# Altium PCB Control_Board_Model_C_Rigid_Flex_Flipped.PcbDoc (part 1 of 8)
Units mil, origin at the board's own origin, x right, y up, seen from the top; angles counter-clockwise.
Board outline 3417.32 x 2110.24 mil, 6 copper layers (1-Sig/GND, 2-Sig, 3-GND, 4-Sig/Pwr, 5-Sig, 6-Sig/GND), stack 39.291 mil thick; 418 components, 342 nets, 1601 pads, 44 vias.
Unrouted connection lines stored in the file: 13.
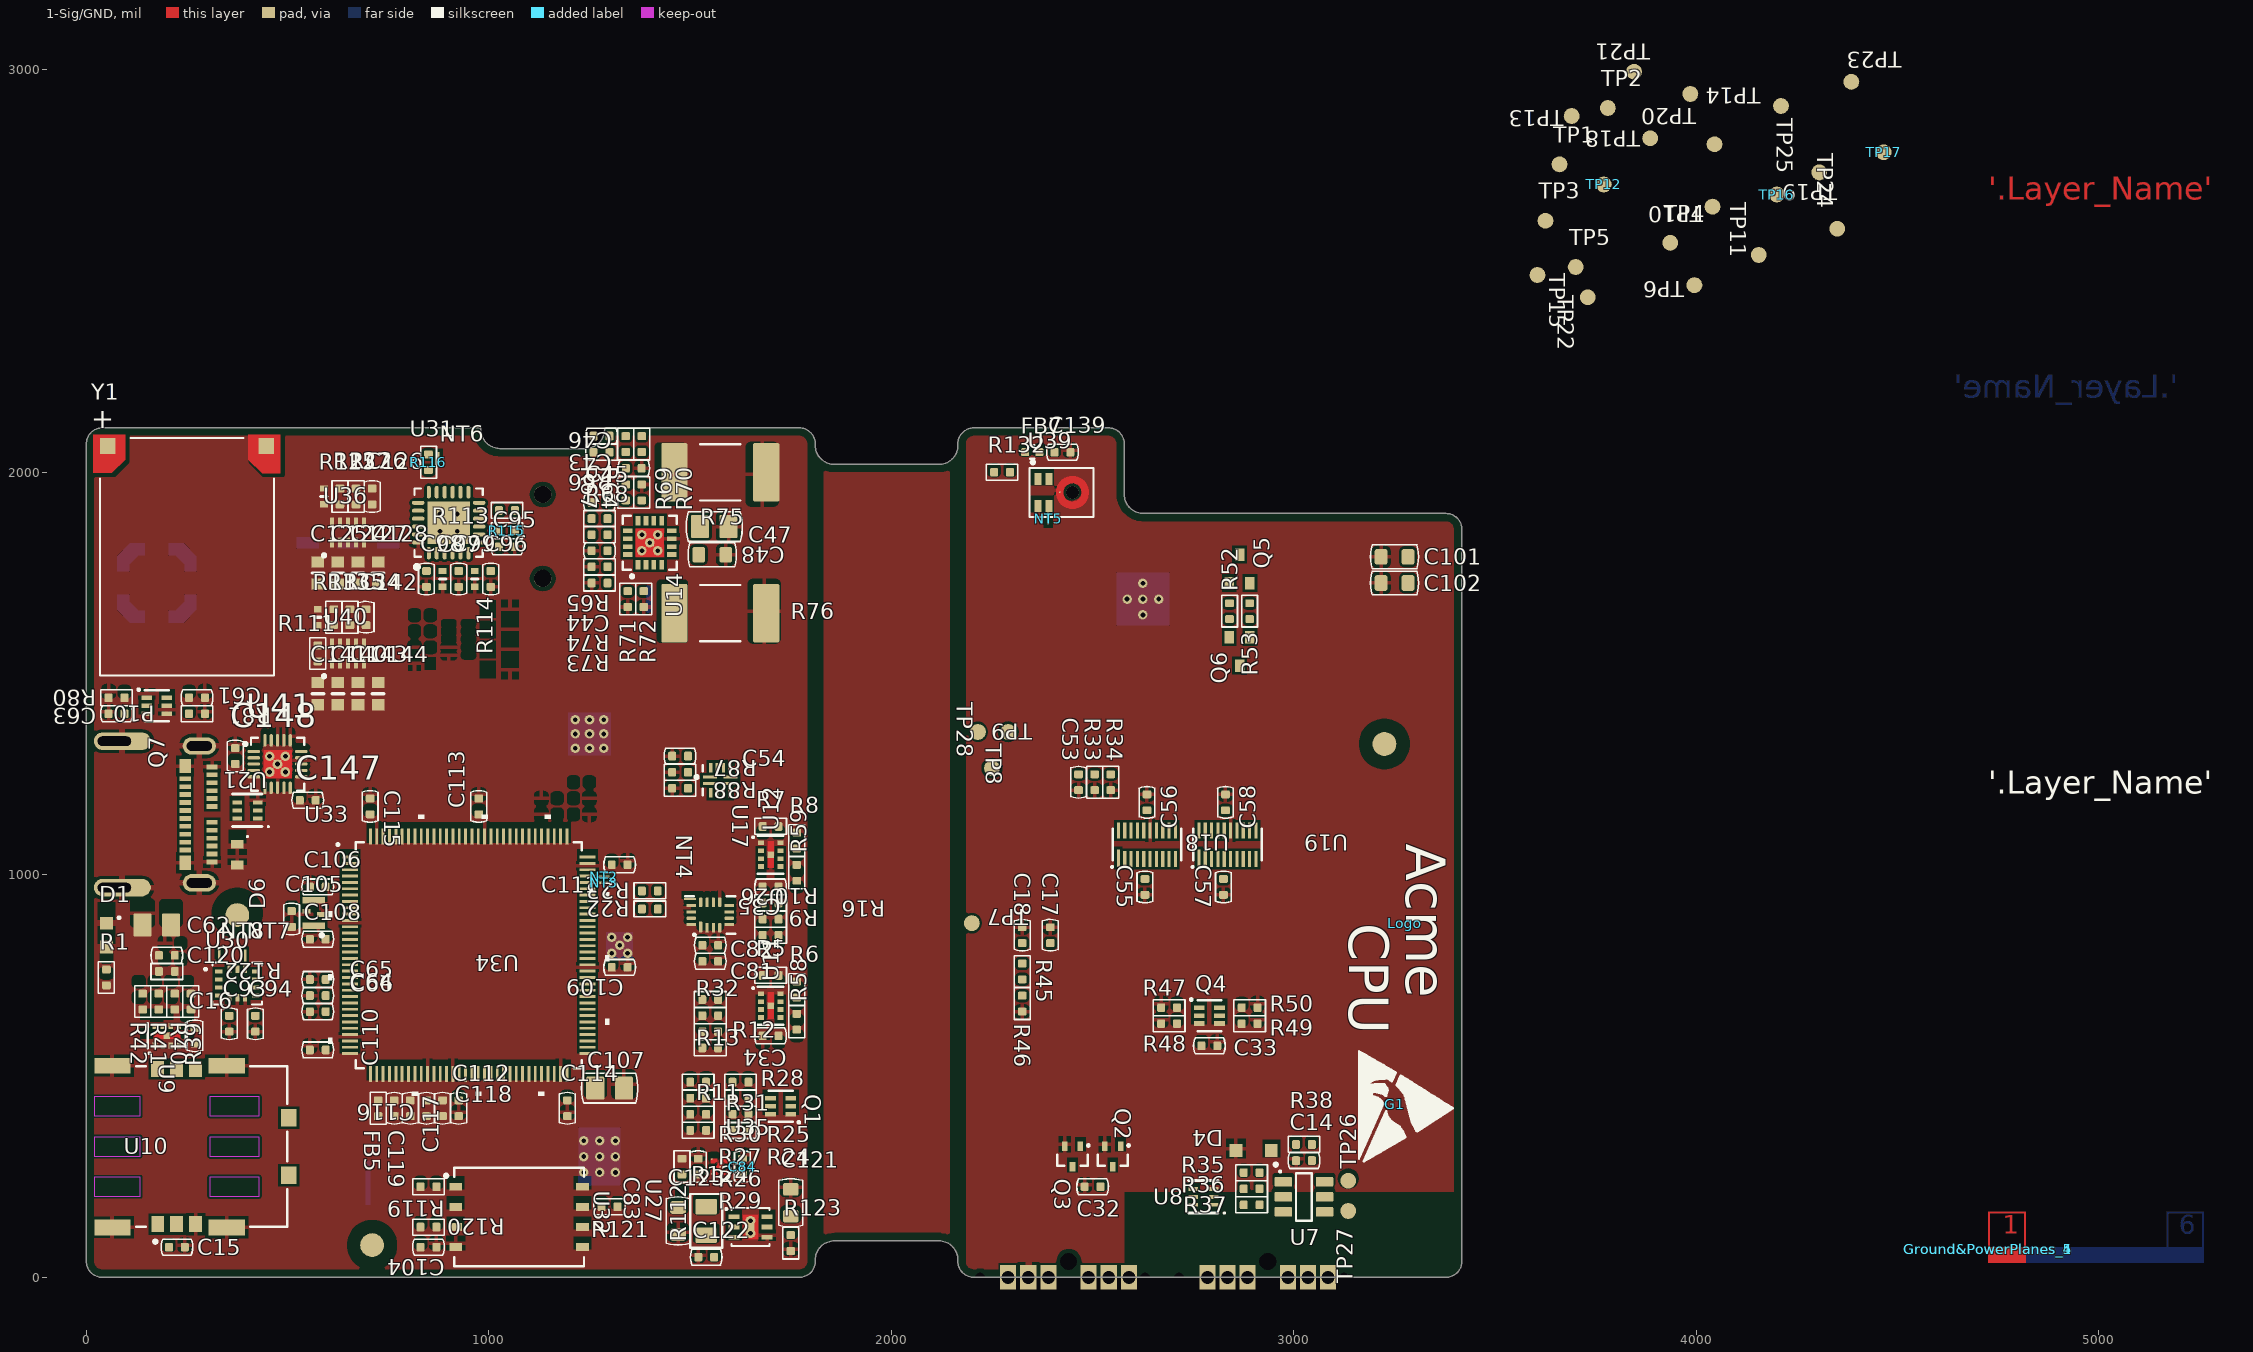
[diagram p0: 1-Sig/GND view]
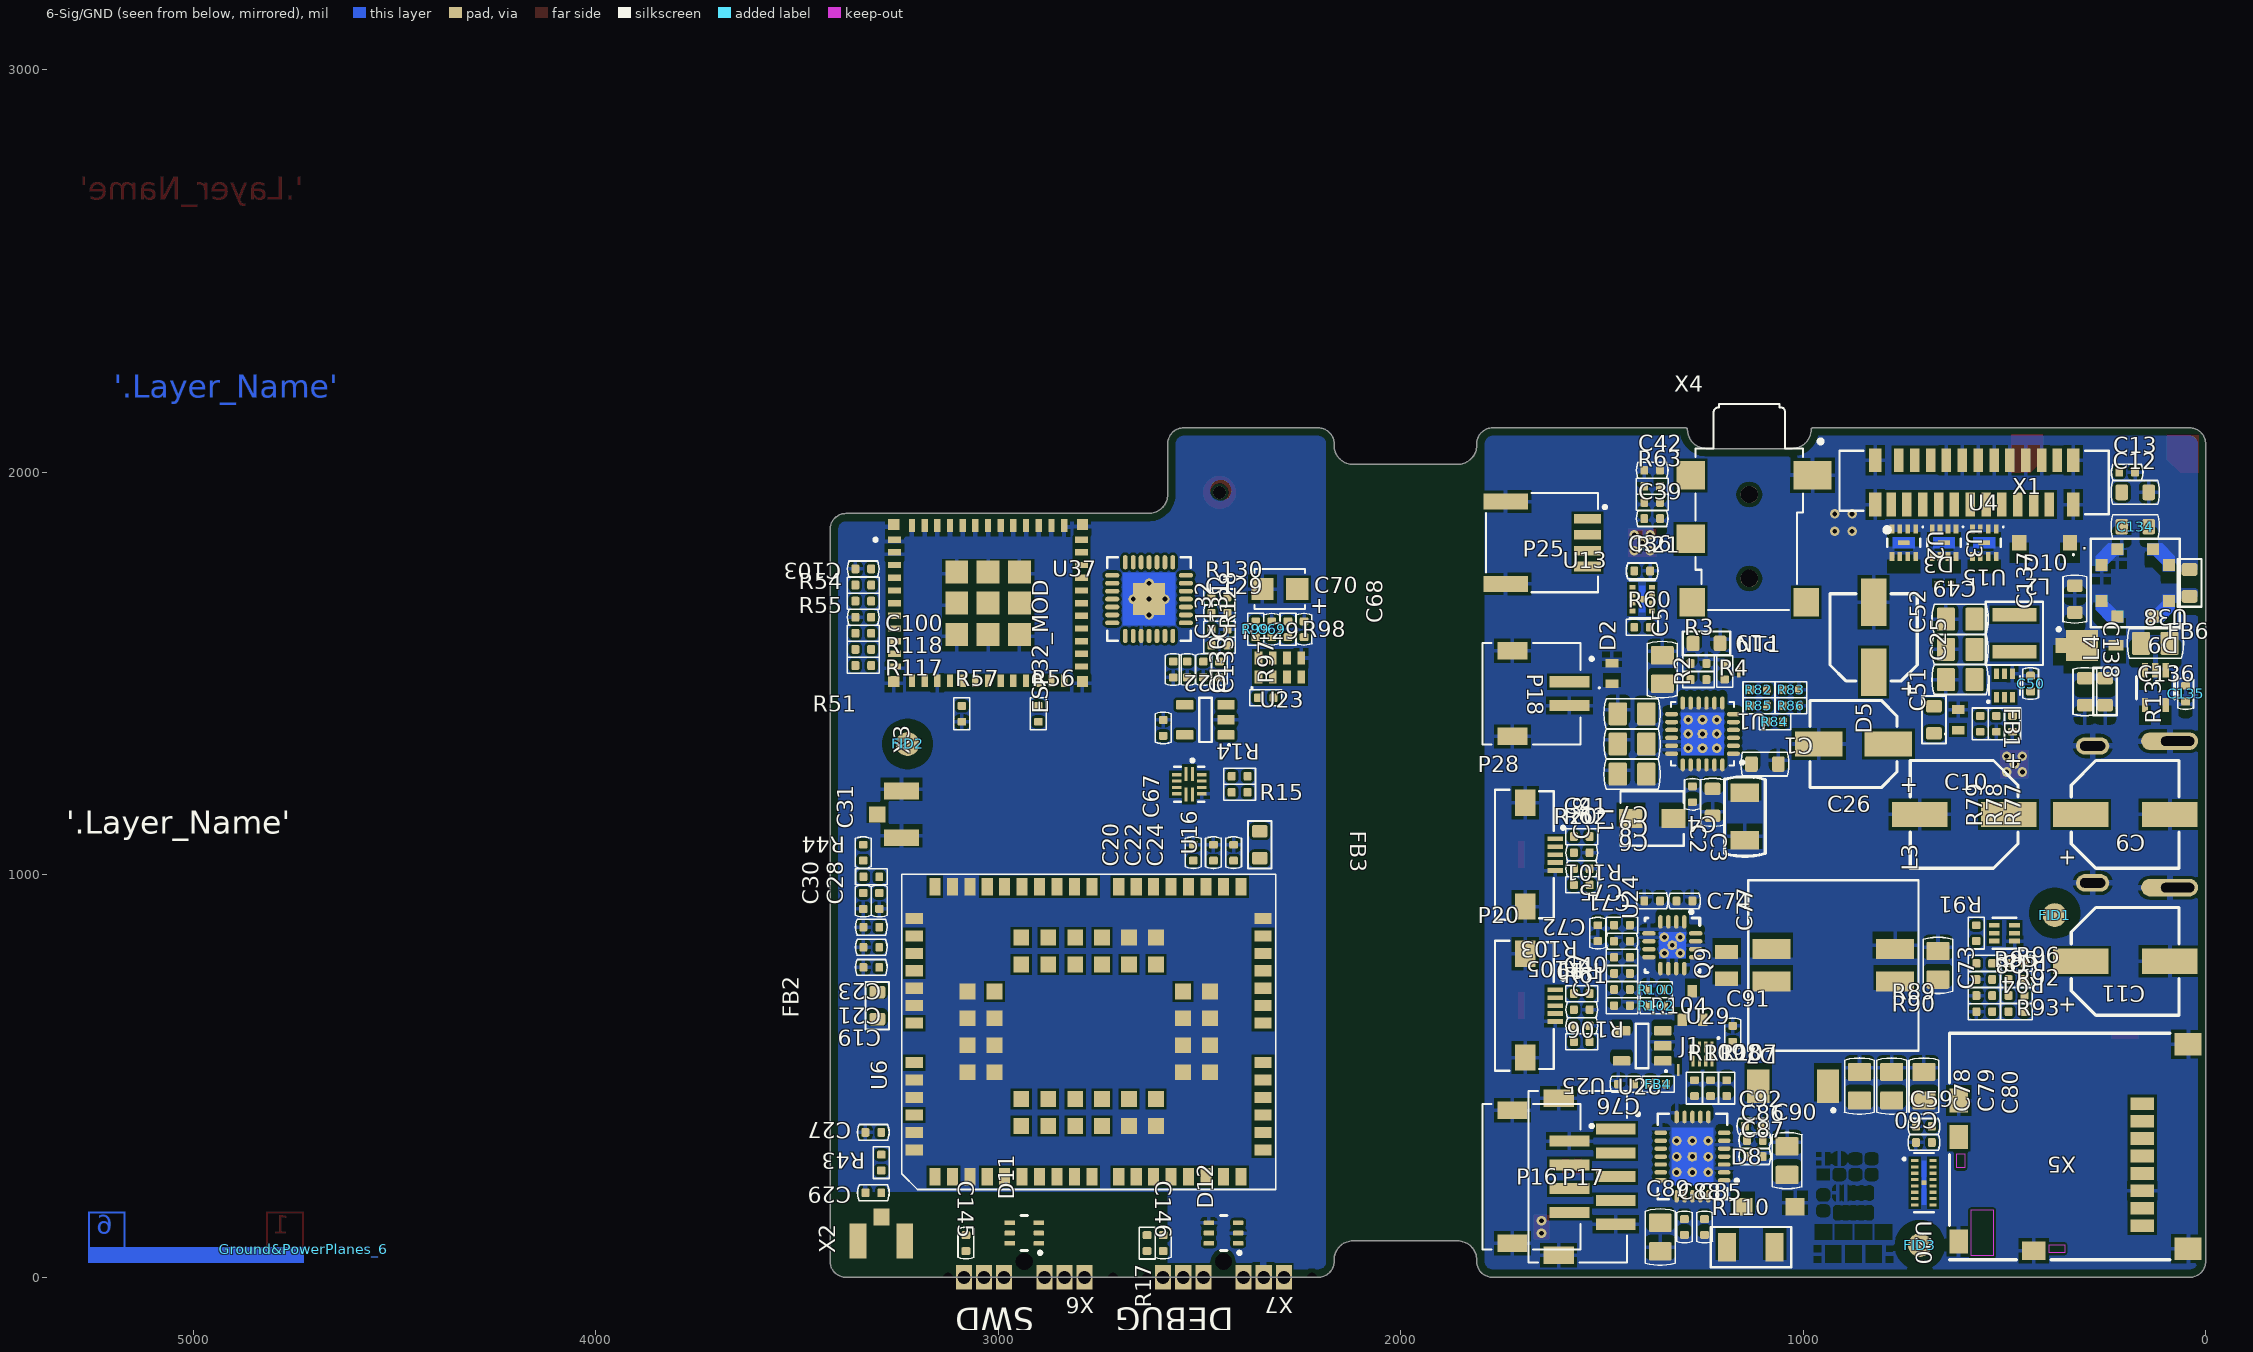
[diagram p1: 6-Sig/GND view, seen from below]
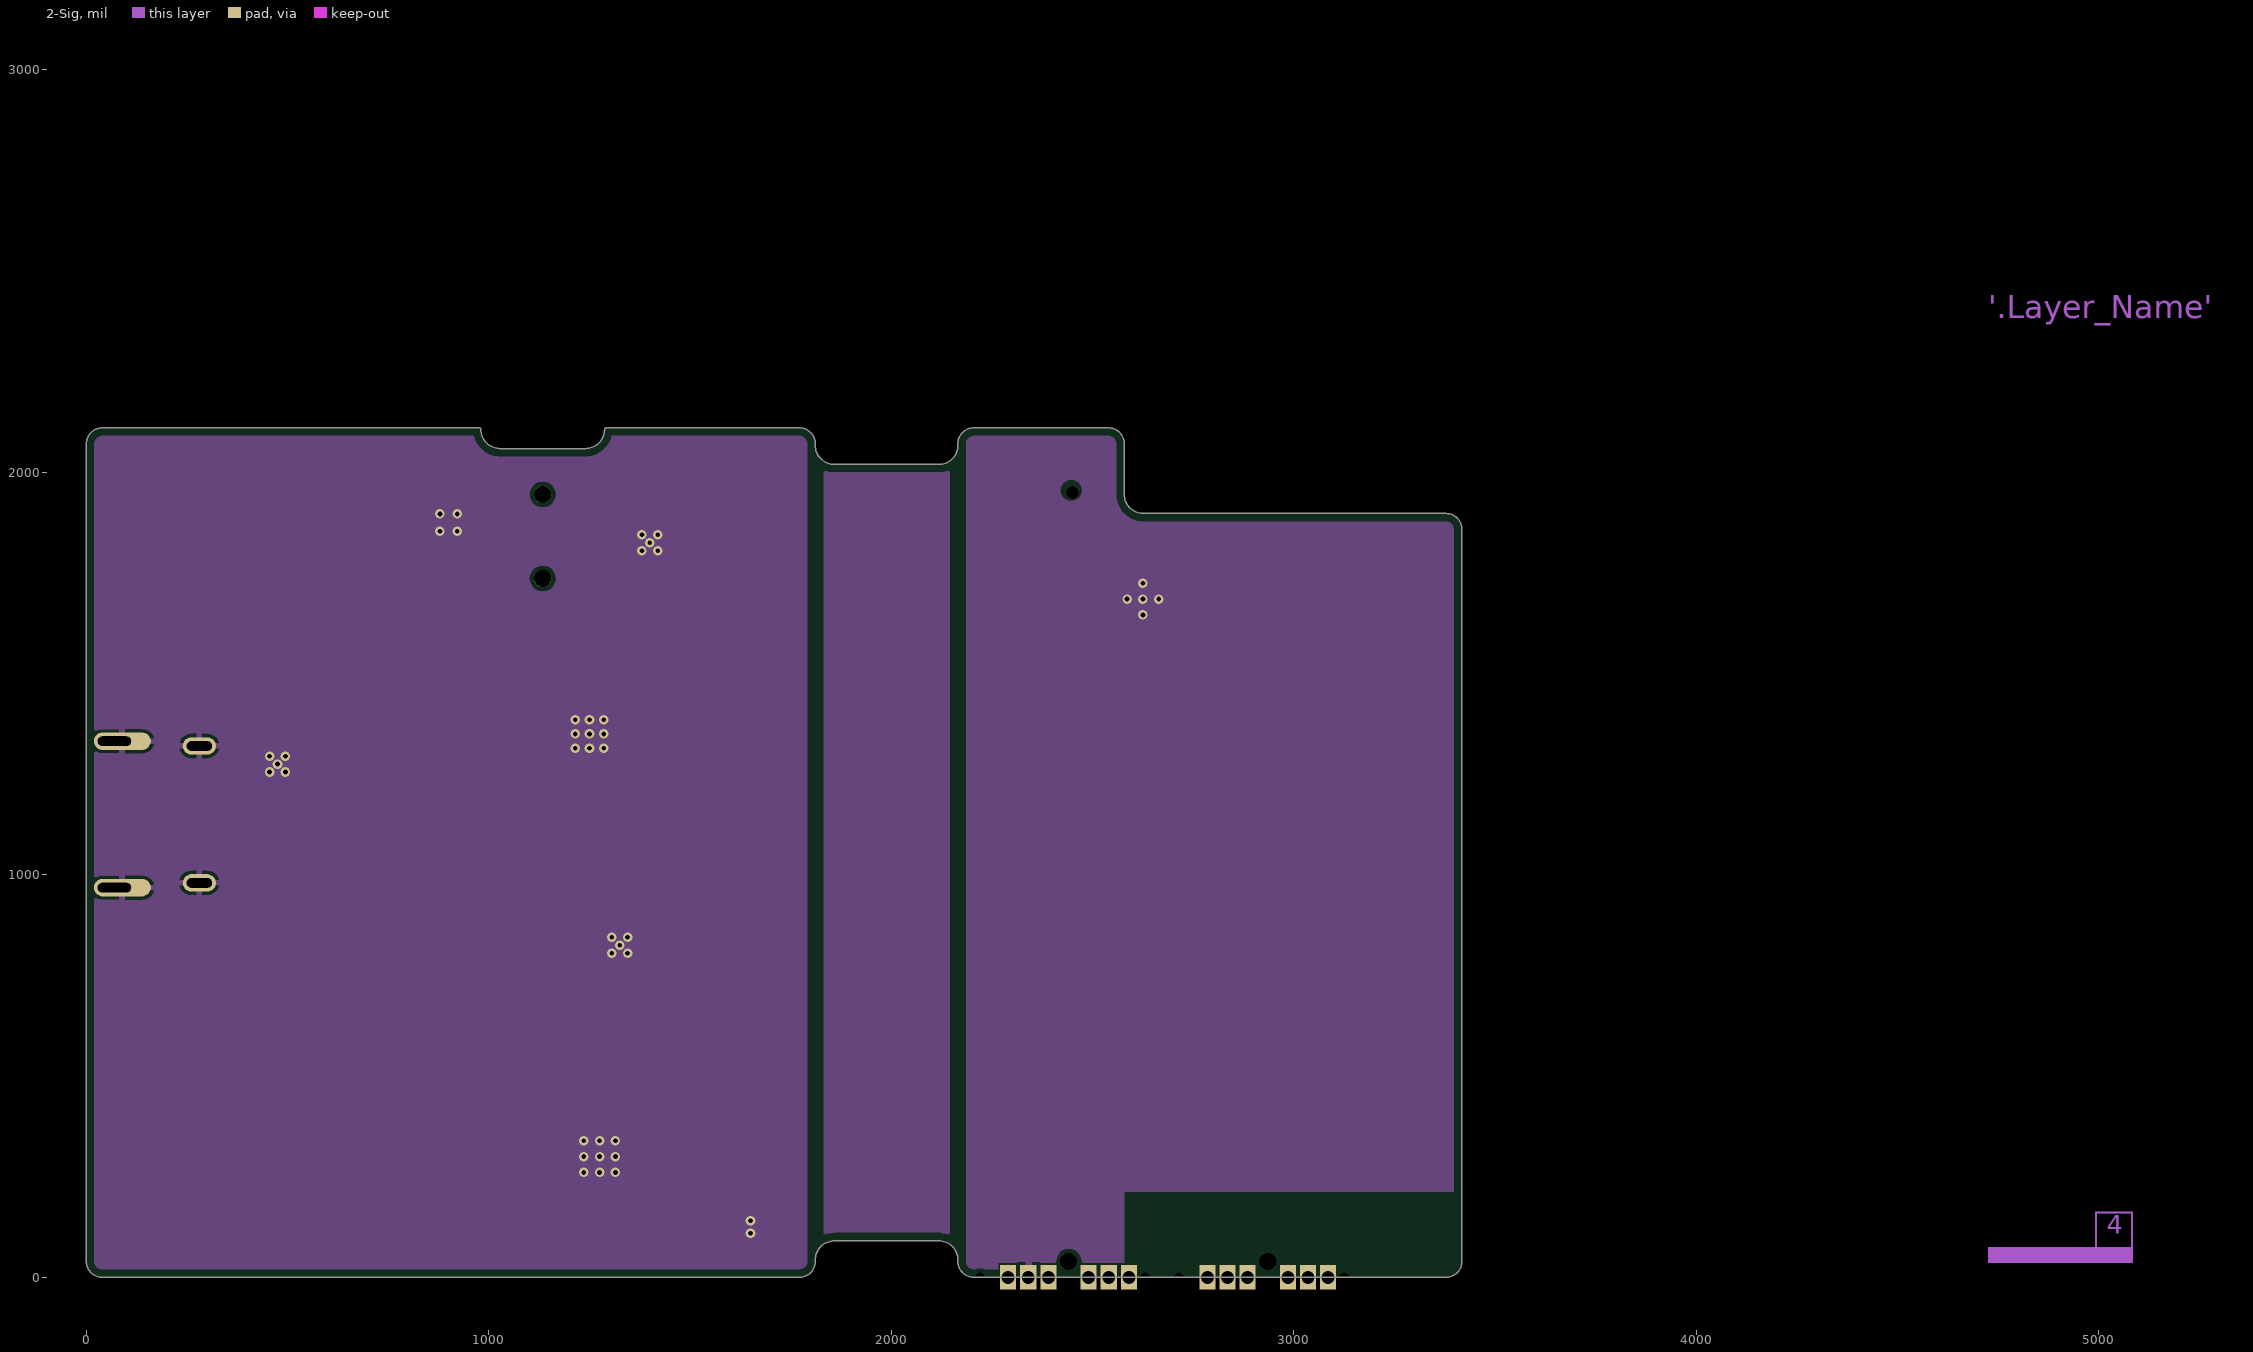
[diagram p2: 2-Sig]
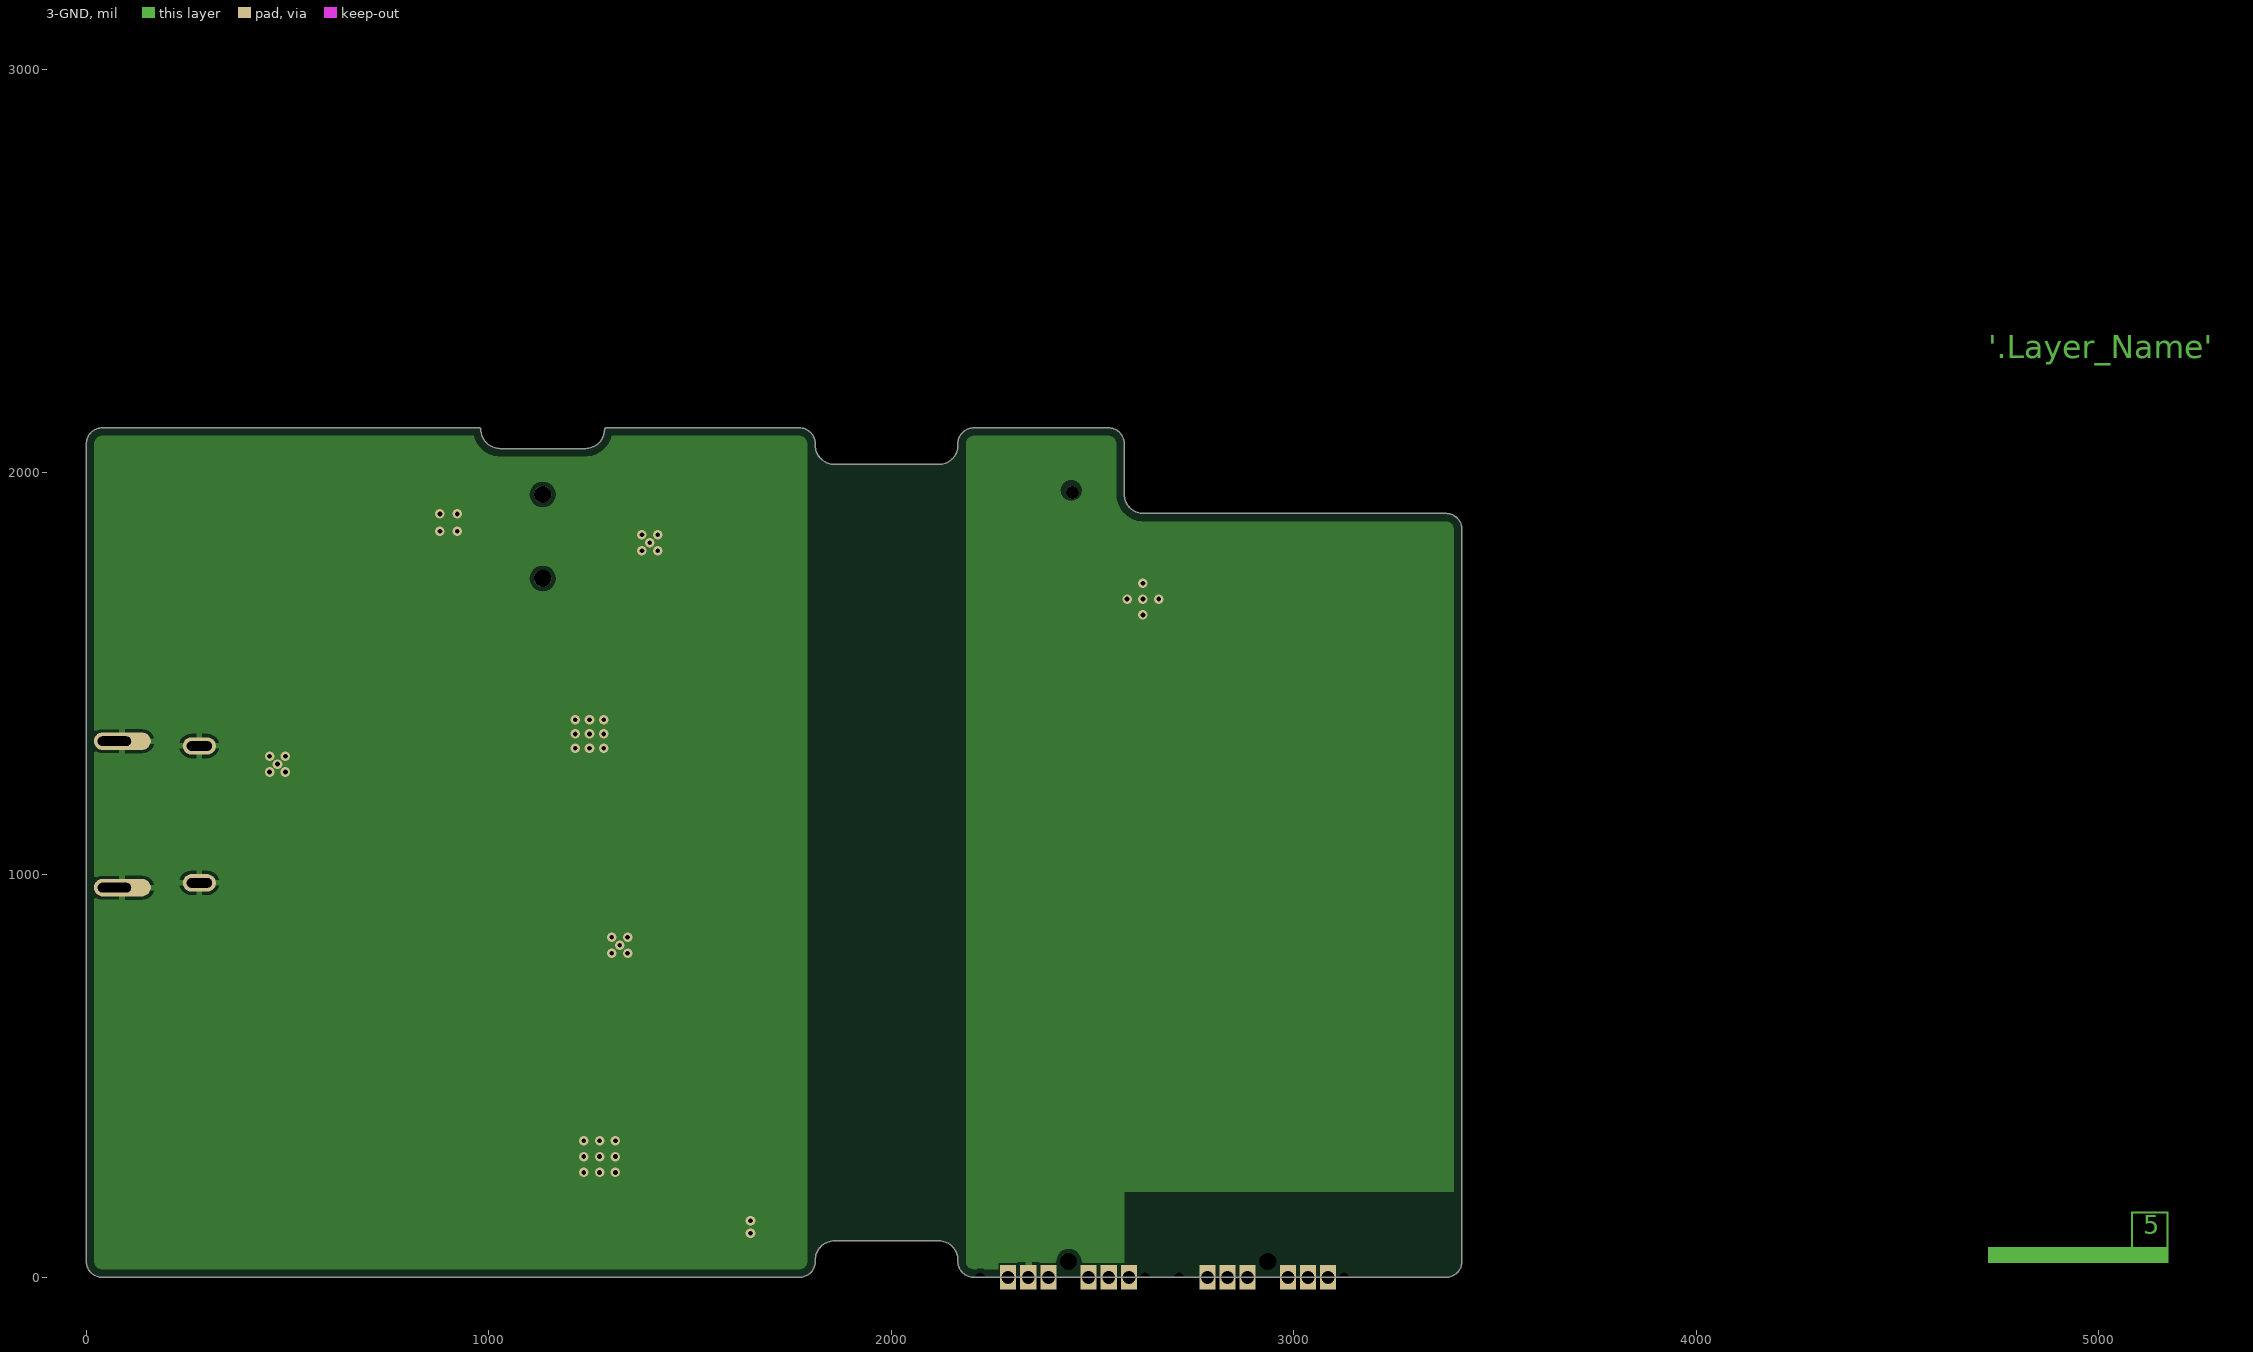
[diagram p3: 3-GND]
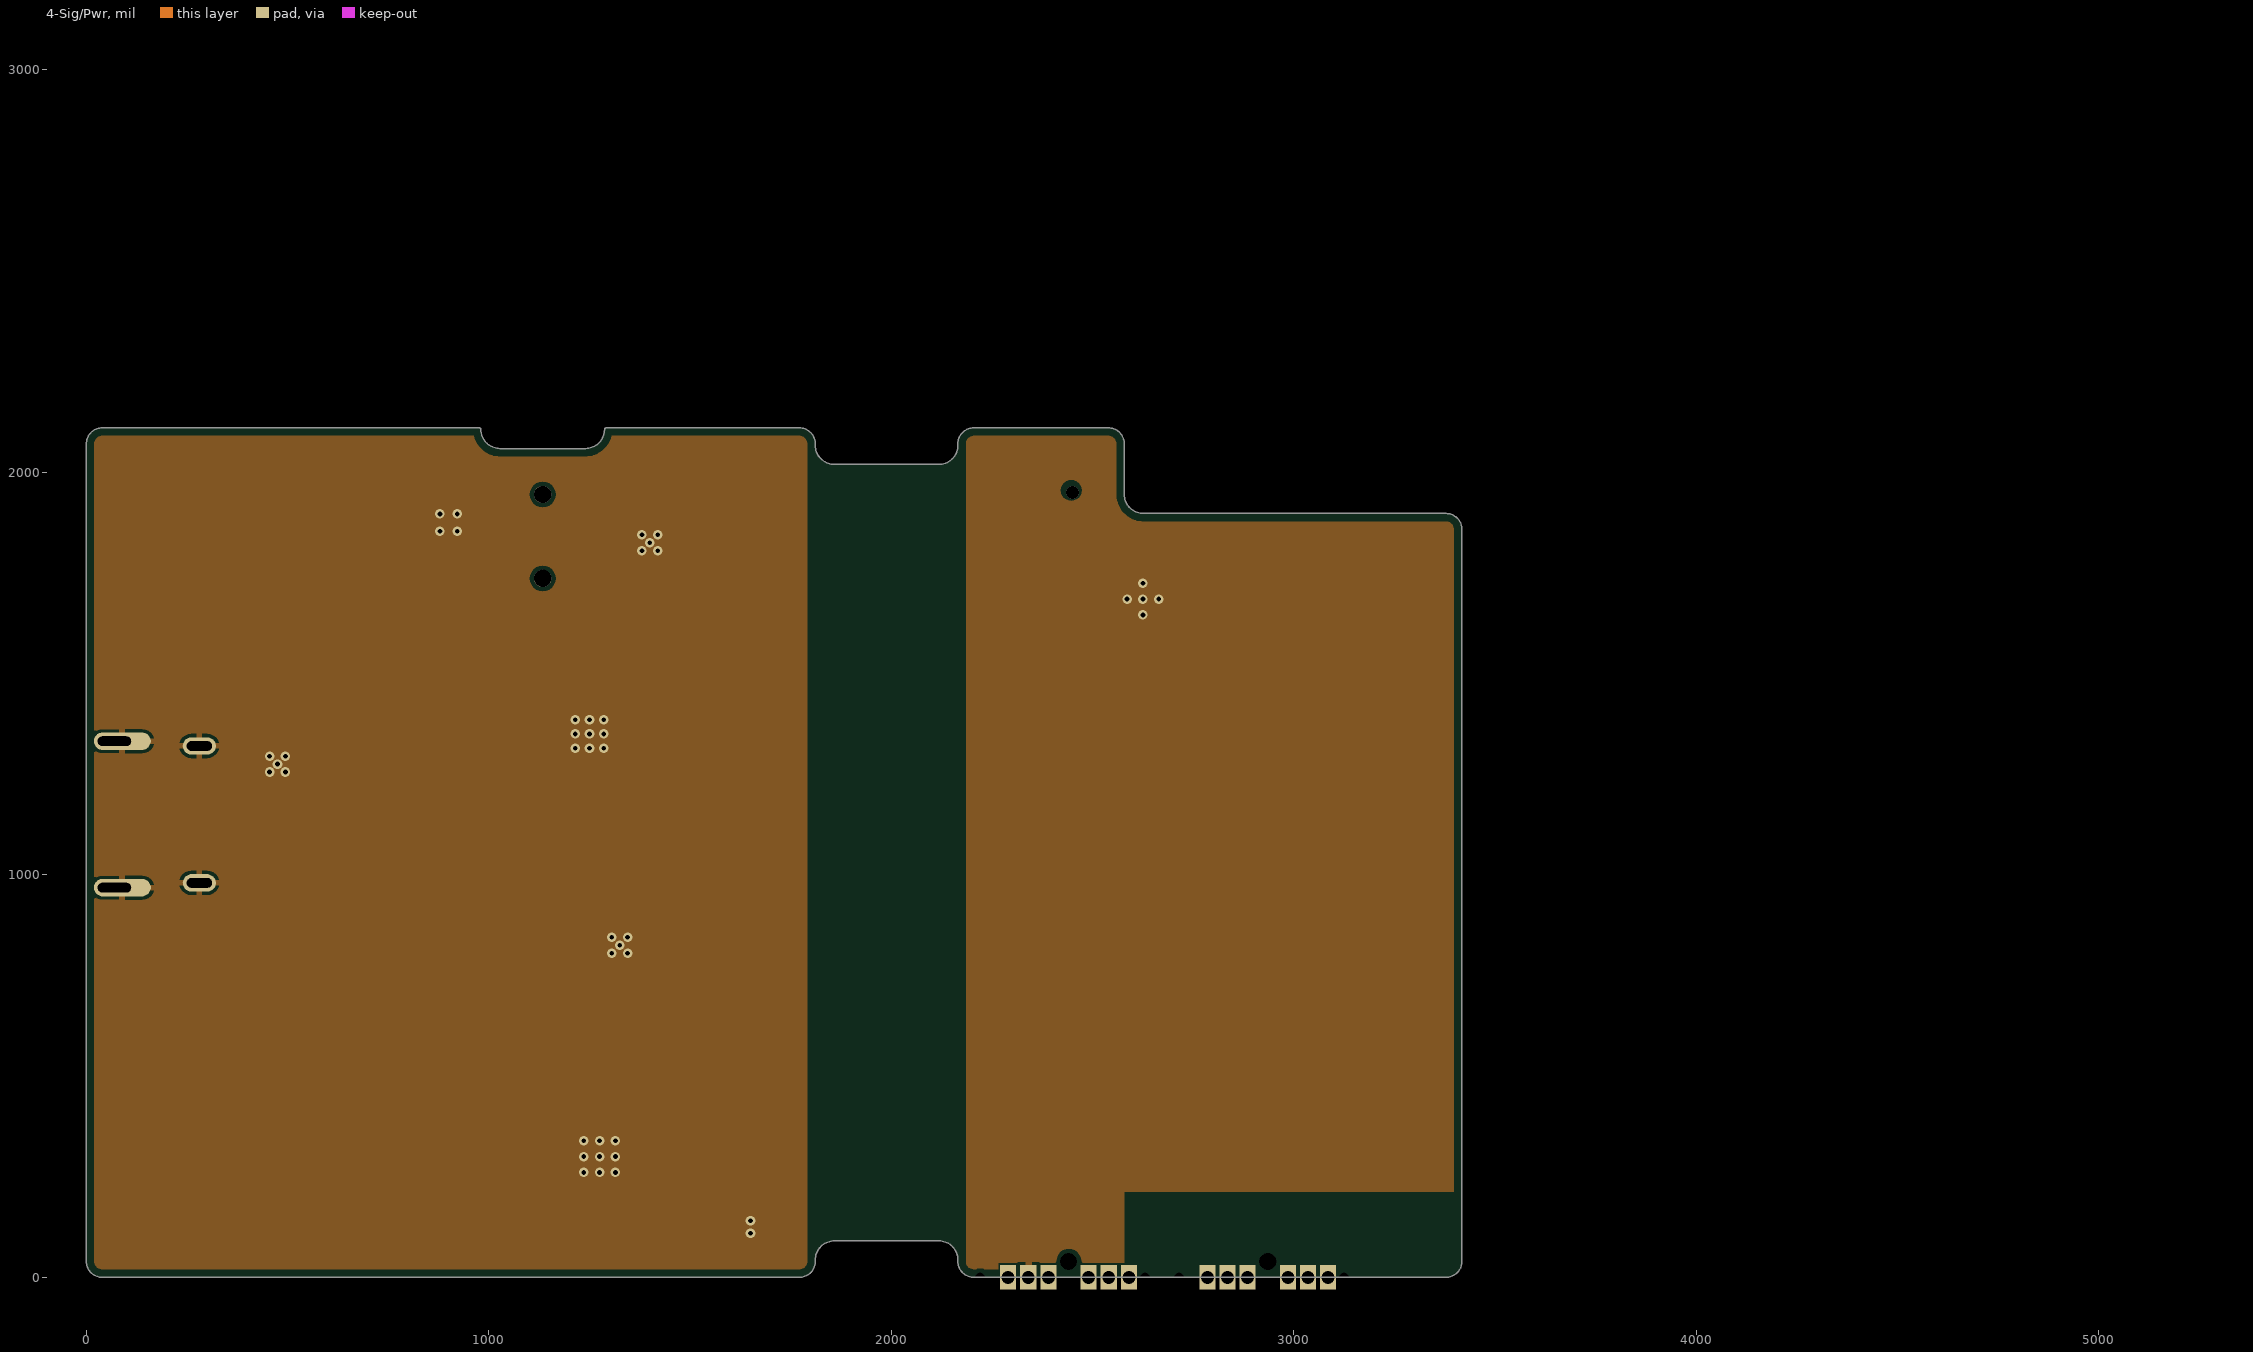
[diagram p4: 4-Sig/Pwr]
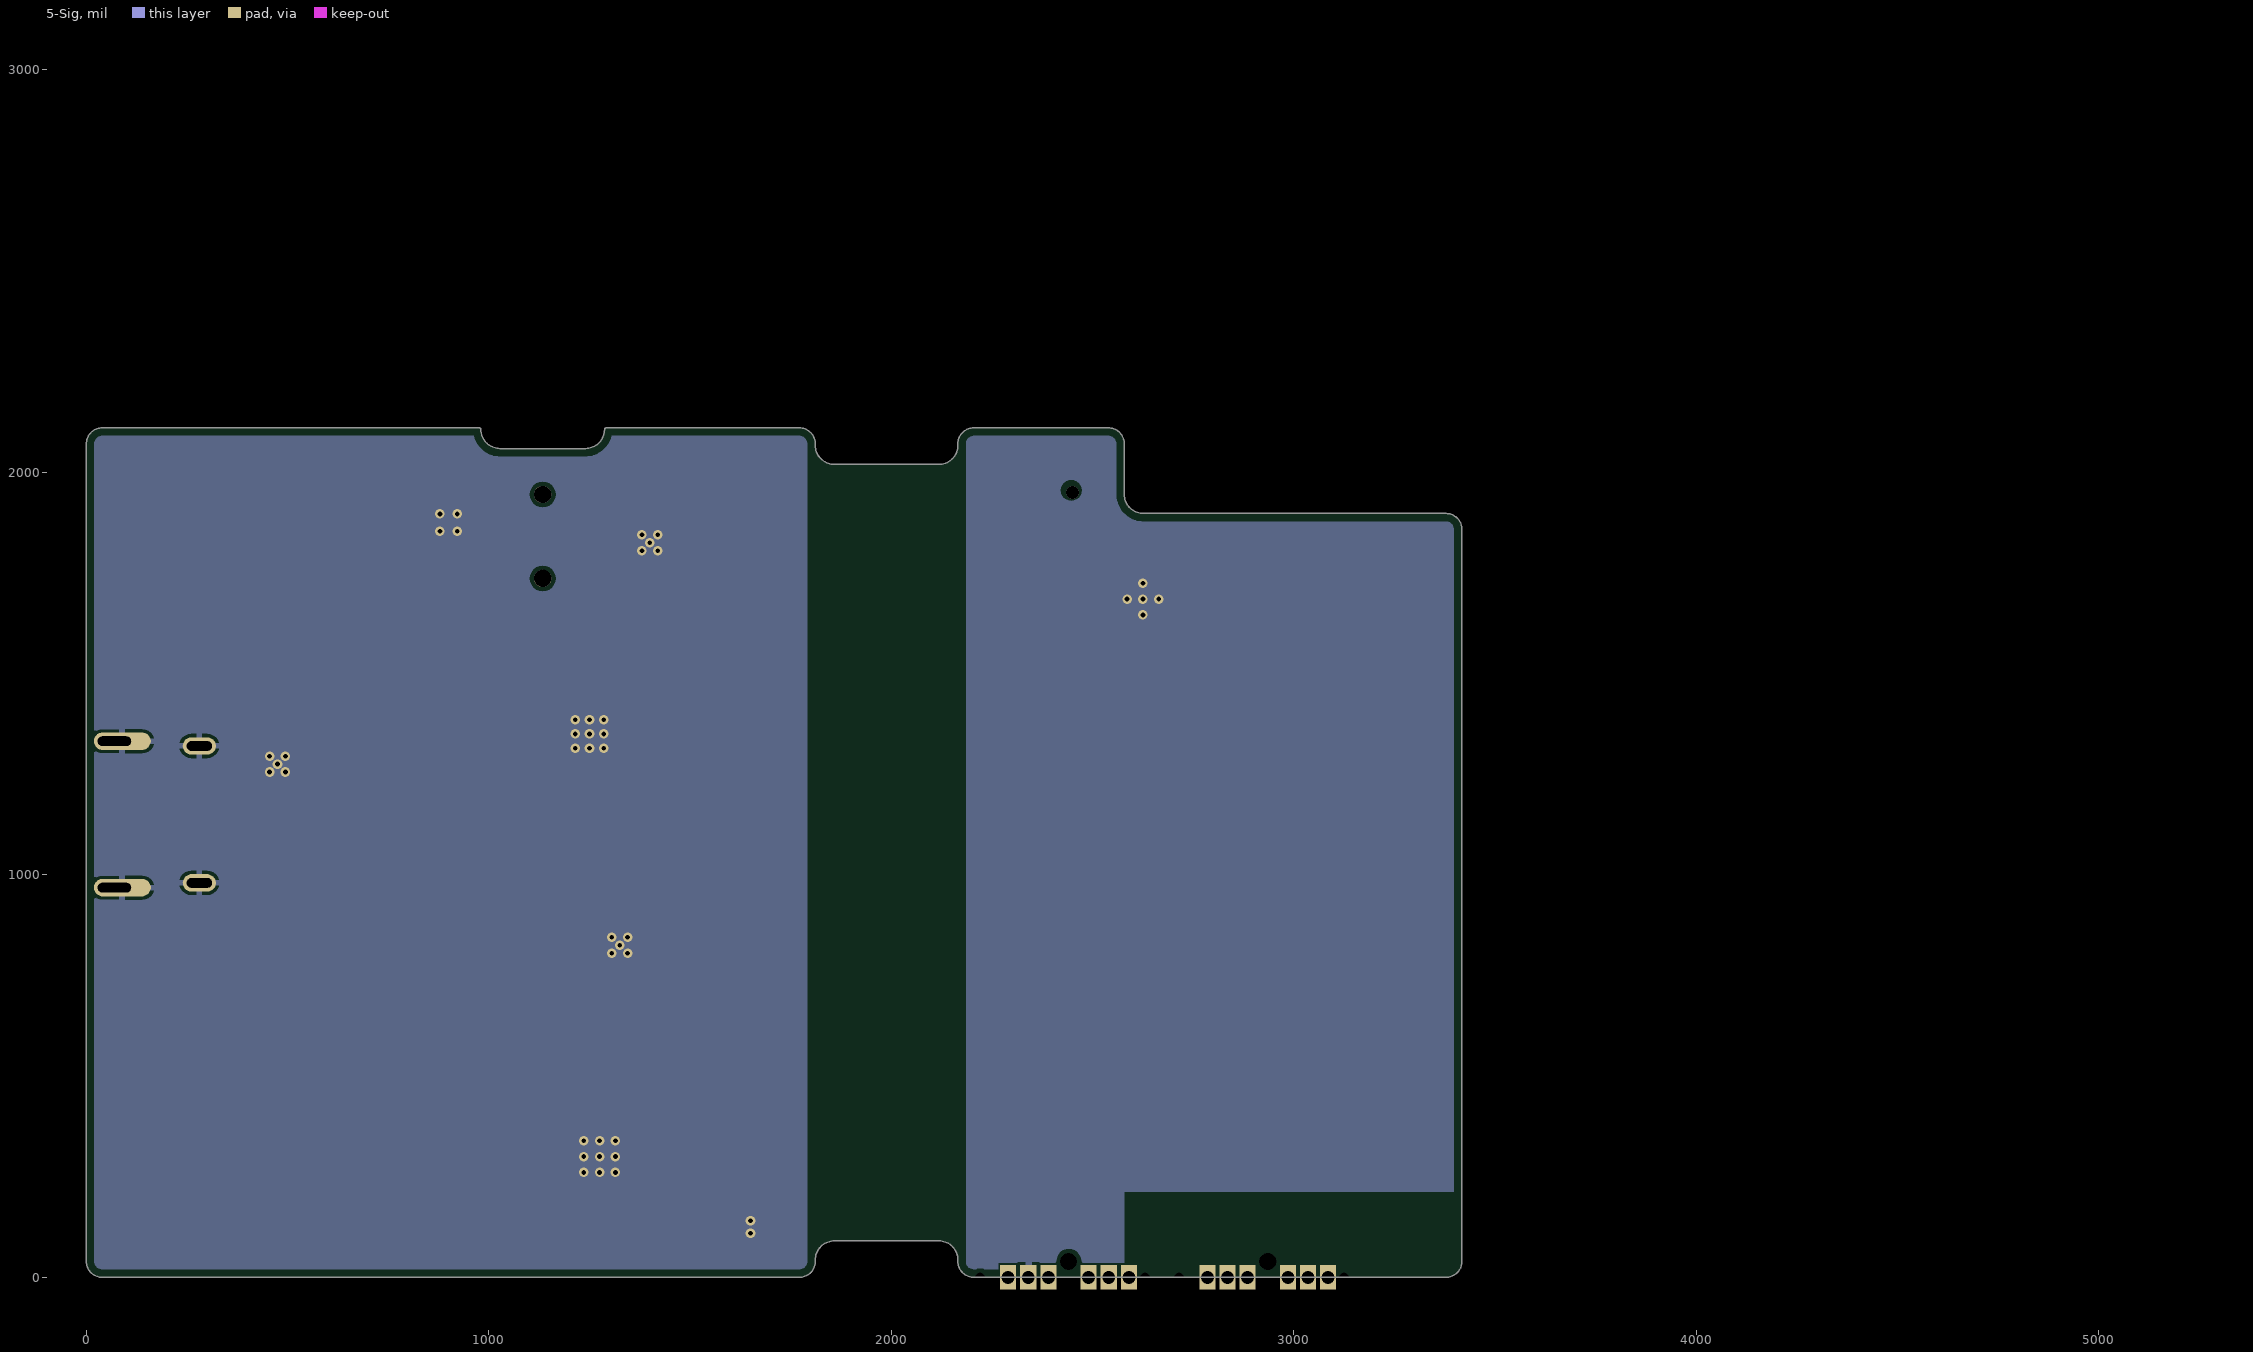
[diagram p5: 5-Sig]

## Layer stack, top to bottom
Top Solder: solder mask 1.5748, WE-SMFlex-0002, Dk 4.3
Top Solder: solder mask 0.5906, WE-SM-0001, Dk 3.5
1-Sig/GND: signal copper 1.7717
Polyimide: core 1.9685, WE-PI-0103, Dk 3.4
2-Sig: signal copper 0.6693
Dielectric 1: prepreg 3.937, WE-PP-0033, Dk 4.4
Core 1: core 9.8425, WE-CO-0045, Dk 4.3
3-GND: signal copper 0.6693
Dielectric 2: prepreg 4.9213, WE-PP-0035, Dk 3.7
4-Sig/Pwr: signal copper 0.6693
Core 2: core 9.8425, WE-CO-0045, Dk 4.3
5-Sig: signal copper 0.6693
Dielectric 3: prepreg 2.5591, WE-PP-0034, Dk 3.5
6-Sig/GND: signal copper 1.7717
Bottom Solder: solder mask 1.5748, WE-CL-0007, Dk 3.6
Bottom Solder: solder mask 0.5906, WE-SM-0001, Dk 3.5

## Board outline
39.37,0 cw(c39.37,39.37) 0,39.37 0,2070.87 cw(c39.37,2070.87) 39.37,2110.24 976.38,2110.24 cw(c976.38,2106.31) 980.31,2106.3 ccw(c1027.55,2106.29) 1027.56,2059.06 1240.16,2059.06 ccw(c1240.16,2106.3) 1287.4,2106.3 cw(c1291.34,2106.3) 1291.34,2110.24 1771.65,2110.24 cw(c1771.64,2070.87) 1811.01,2070.86 1811.02,2070.86 1811.02,2066.93 ccw(c1858.27,2066.93) 1858.27,2019.69 2118.11,2019.69 ccw(c2118.11,2066.93) 2165.35,2066.93 2165.35,2070.87 cw(c2204.72,2070.87) 2204.72,2110.23 2204.72,2110.24 2539.37,2110.24 cw(c2539.37,2070.87) 2578.74,2070.87 2578.74,1944.88 ccw(c2625.98,1944.88) 2625.98,1897.64 3377.95,1897.64 cw(c3377.95,1858.27) 3417.32,1858.27 3417.32,39.37 cw(c3377.95,39.37) 3377.95,0 2204.72,0 cw(c2204.72,39.36) 2165.35,39.37 2165.35,43.31 ccw(c2118.12,43.31) 2118.12,90.54 1858.27,90.55 ccw(c1858.27,43.31) 1811.02,43.31 1811.02,39.37 cw(c1771.67,39.35) 1771.65,0
board region "Layer Stack Region 2": 2165.37,35.4 2165.35,35.49 2165.35,39.37 2165.35,43.31 2165.13,47.94 2163.32,57.02 2159.78,65.57 2154.63,73.27 2148.09,79.82 2140.39,84.96 2131.83,88.51 2122.75,90.31 2118.12,90.54 1858.27,90.55 1853.64,90.32 1844.56,88.52 1836,84.97 1828.3,79.83 1821.75,73.28 1816.6,65.58 1813.06,57.02 1811.25,47.94 1811.02,43.29 1811.02,2066.94 1811.25,2062.3 1813.06,2053.21 1816.6,2044.66 1821.75,2036.96 1828.3,2030.41 1836,2025.26 1844.56,2021.72 1853.64,2019.91 1858.27,2019.69 2118.11,2019.69 2122.74,2019.91 2131.82,2021.72 2140.38,2025.26 2148.08,2030.41 2154.63,2036.96 2159.77,2044.66 2163.32,2053.21 2165.12,2062.3 2165.35,2066.95
board region "Layer Stack Region 1": 1811.02,42.33 1811.02,39.37 1811.03,35.49 1809.51,27.88 1806.55,20.72 1802.24,14.27 1796.75,8.78 1790.31,4.47 1783.14,1.51 1775.53,0 1771.65,0 39.37,0 35.49,0 27.89,1.51 20.72,4.48 14.27,8.79 8.79,14.27 4.48,20.72 1.51,27.89 0,35.49 0,39.37 0,2070.87 0,2074.74 1.51,2082.35 4.48,2089.52 8.79,2095.96 14.27,2101.45 20.72,2105.76 27.89,2108.72 35.49,2110.24 39.37,2110.24 976.38,2110.24 977.16,2110.24 978.61,2109.64 979.72,2108.53 980.32,2107.08 980.32,2106.3 980.54,2101.67 982.35,2092.58 985.89,2084.03 991.04,2076.33 997.59,2069.78 1005.29,2064.63 1013.84,2061.09 1022.93,2059.28 1027.56,2059.06 1240.16,2059.06 1244.79,2059.28 1253.87,2061.09 1262.43,2064.63 1270.13,2069.78 1276.68,2076.33 1281.82,2084.03 1285.37,2092.59 1287.17,2101.67 1287.4,2106.3 1287.4,2107.08 1288,2108.53 1289.11,2109.64 1290.56,2110.24 1291.34,2110.24 1771.65,2110.24 1775.53,2110.24 1783.14,2108.72 1790.3,2105.75 1796.75,2101.44 1802.23,2095.95 1806.53,2089.5 1809.5,2082.34 1811.01,2074.73 1811.02,2070.86 1811.02,2067.59
board region "Layer Stack Region 3": 2165.35,2067.84 2165.35,2070.87 2165.35,2074.74 2166.87,2082.35 2169.83,2089.51 2174.14,2095.96 2179.63,2101.45 2186.07,2105.75 2193.24,2108.72 2200.84,2110.23 2204.72,2110.24 2539.37,2110.24 2543.25,2110.24 2550.85,2108.72 2558.02,2105.76 2564.47,2101.45 2569.95,2095.96 2574.26,2089.52 2577.23,2082.35 2578.74,2074.74 2578.74,2070.87 2578.74,1944.88 2578.97,1940.25 2580.77,1931.17 2584.32,1922.61 2589.46,1914.91 2596.01,1908.36 2603.71,1903.22 2612.27,1899.67 2621.35,1897.87 2625.98,1897.64 3377.95,1897.64 3381.83,1897.64 3389.44,1896.13 3396.6,1893.16 3403.05,1888.85 3408.53,1883.37 3412.84,1876.92 3415.81,1869.75 3417.32,1862.15 3417.32,1858.27 3417.32,39.37 3417.32,35.49 3415.81,27.89 3412.84,20.72 3408.53,14.27 3403.05,8.79 3396.6,4.48 3389.44,1.51 3381.83,0 3377.95,0 2204.72,0 2200.85,0 2193.24,1.51 2186.07,4.48 2179.62,8.79 2174.14,14.27 2169.83,20.72 2166.86,27.88 2165.37,35.41

## Design rules (kind name [scope] priority, off if disabled: settings)
BoardOutlineClearance BoardOutlineClearance_LayerStack [WithinRoom('PCB_Stackup')] p1: gap=0 ignorepadtopadclearanceinfootprint=FALSE
BoardOutlineClearance BoardOutlineClearance_LayerNames [WithinRoom('Layer_Names')] p2: gap=0 ignorepadtopadclearanceinfootprint=FALSE
BoardOutlineClearance BoardOutlineClearance_uSD_Slot [HasFootprintPad('5025700893','0')] p3: gap=0 ignorepadtopadclearanceinfootprint=FALSE
BoardOutlineClearance BoardOutlineClearance_USB-C_Conn [HasFootprintPad('MOLEX_2012670005','S3') or HasFootprintPad('MOLEX_2012670005','S4')] p4: gap=0 ignorepadtopadclearanceinfootprint=FALSE
BoardOutlineClearance BoardOutlineClearance_nanoSIM_Slot [HasFootprintPad('1042240820_MOL','G4') or HasFootprintPad('1042240820_MOL','G1') or ((ObjectKind = 'Fill') and HasFootprint('1042240820_MOL'))] p5: gap=0 ignorepadtopadclearanceinfootprint=FALSE
BoardOutlineClearance BoardOutlineClearance_Overlays [OnBottomSilkscreen or OnTopSilkscreen] p6: gap=0 ignorepadtopadclearanceinfootprint=FALSE
BoardOutlineClearance BoardFlexRigid [OnLayer('Top Side')] p7: gap=19.68 ignorepadtopadclearanceinfootprint=FALSE except(0: Arc-SplitContinuation Track-SplitContinuation Fill-SplitContinuation Poly-SplitContinuation Region-SplitContinuation; 59.06: SMDPad-SplitBarrior SMDPad-SplitContinuation THPad-SplitBarrior THPad-SplitContinuation Via-SplitBarrior Via-SplitContinuation Text-SplitContinuation)
BoardOutlineClearance [All] p8: gap=19.68 ignorepadtopadclearanceinfootprint=FALSE
Clearance Clearance_InnerLayers [not OnTopLayer and not OnBottomLayer] p1: gap=6 ignorepadtopadclearanceinfootprint=TRUE except(5.98: Arc-SMDPad Arc-THPad Arc-Via Track-SMDPad Track-THPad Track-Via THPad-THPad THPad-Via THPad-Fill THPad-Poly THPad-Region Via-Via Via-Fill Via-Poly Via-Region; 9.84: Arc-Hole Track-Hole SMDPad-Hole THPad-Hole Via-Hole Fill-Hole Poly-Hole Region-Hole Text-Hole)
Clearance [All] p2: gap=6 ignorepadtopadclearanceinfootprint=FALSE
ComponentClearance ComponentClearance_NetTie [HasFootprint('Net Tie 6x30mil')] p1: gap=0 collisioncheckmode=3 verticalgap=0 showdistances=FALSE
ComponentClearance ComponentClearance_PCB_Stackup [WithinRoom('PCB_Stackup')] p2: gap=0 collisioncheckmode=3 verticalgap=0 showdistances=FALSE
ComponentClearance ComponentClearance_Motor_Connectors [HasFootprint('CONN_JST_S5B-ZR-SM4A-TF(LF)(SN)') vs HasFootprint('CONN_JST_S4B-ZR-SM4A-TF(LF)(SN)')] p3: gap=0 collisioncheckmode=3 verticalgap=0 showdistances=FALSE
ComponentClearance [All] p4: gap=12 collisioncheckmode=3 verticalgap=40 showdistances=FALSE
DiffPairsRouting [All] p1: maxlimit=6 minlimit=6 mostfreqgap=6 toplayer_minwidth=6 toplayer_maxwidth=6 toplayer_prefwidth=6 midlayer1_minwidth=6 midlayer1_maxwidth=6 midlayer1_prefwidth=6 midlayer2_minwidth=6 midlayer2_maxwidth=6 midlayer2_prefwidth=6 midlayer3_minwidth=6 midlayer3_maxwidth=6 midlayer3_prefwidth=6 midlayer4_minwidth=6 midlayer4_maxwidth=6 midlayer4_prefwidth=6 bottomlayer_minwidth=6 bottomlayer_maxwidth=6 bottomlayer_prefwidth=6 maxuncoupledlength=500
HoleSize [All] p1: absolutevalues=TRUE maxlimit=248.03 minlimit=5.91 maxpercent=80.000 minpercent=20.000
HoleToHoleClearance [All] p1: gap=10 allowstackedmicrovias=FALSE
MatchedLengths MatchedLengths_QSPI [InNetClass('QSPI')] p1: tolerance=50 checknetsindiffpair=FALSE checkdiffpairvsdiffpair=TRUE checkxsignals=TRUE checkothers=TRUE
MinimumAnnularRing MinimumAnnularRing_Via_Int [IsVia and not (OnTopLayer or OnBottomLayer)] p1: minimumring=0
MinimumAnnularRing [All] p2: minimumring=6
MinimumSolderMaskSliver [All] p1: minsoldermaskwidth=3
PlaneClearance [All] p1: clearance=9.84
PlaneConnect PlaneConnect_Via [IsVia] p1: planeconnectstyle=Direct reliefexpansion=20 reliefentries=4 reliefconductorwidth=10 reliefairgap=10
PlaneConnect PlaneConnect_HeatTrap [All] p2: pad.planeconnectstyle=Relief pad.reliefexpansion=6 pad.reliefentries=4 pad.reliefconductorwidth=6 pad.reliefairgap=6 via.planeconnectstyle=Direct via.reliefexpansion=8 via.reliefentries=4 via.reliefconductorwidth=10 via.reliefairgap=10
PolygonConnect PolygonConnect_Via [IsVia] p1: connectstyle=Direct reliefconductorwidth=10 reliefentries=4 polygonreliefangle="90 Angle" airgapwidth=10
PolygonConnect PolygonConnect_TestPoints [InComponentClass('TestPoint')] p2: connectstyle=Direct reliefconductorwidth=10 reliefentries=4 polygonreliefangle="90 Angle" airgapwidth=10
PolygonConnect PolygonConnect_ThermPads [HasFootprintPad('DFN65P100X40-4N','5')] p3: connectstyle=Direct reliefconductorwidth=10 reliefentries=4 polygonreliefangle="90 Angle" airgapwidth=10
PolygonConnect PolygonConnect_BG95_GND [HasFootprint('BG95') and (InNet('GND') or InNetClass('BG95_PWR'))] p4: connectstyle=Direct reliefconductorwidth=10 reliefentries=4 polygonreliefangle="90 Angle" airgapwidth=10
PolygonConnect [All] p5: thpad.connectstyle=Relief thpad.reliefconductorwidth=15 thpad.reliefentries=4 thpad.polygonreliefangle="90 Angle" thpad.airgapwidth=8 smdpad.connectstyle=Relief smdpad.reliefconductorwidth=10 smdpad.reliefentries=4 smdpad.polygonreliefangle="90 Angle" smdpad.airgapwidth=8 via.connectstyle=Direct via.reliefconductorwidth=10 via.reliefentries=4 via.polygonreliefangle="90 Angle" via.airgapwidth=10
RoomDefinition +3V3_PS [InComponentClass('+3V3_PS')] p1: confinementstyle=ConfineIn formatcopy=TRUE lockcomponents=FALSE outline 750,1400 550,1400 550,1675 750,1675
RoomDefinition P105 [InComponentClass('P105')] p2: confinementstyle=ConfineIn formatcopy=TRUE lockcomponents=FALSE outline 2400,1300 2625,1300 2625,1475 2400,1475
RoomDefinition P26 [InComponentClass('P26')] p3: confinementstyle=ConfineIn formatcopy=TRUE lockcomponents=FALSE outline 2200,1400 2400,1400 2400,1775 2200,1775
RoomDefinition USB-to-UART_Bridge [InComponentClass('USB-to-UART_Bridge')] p4: confinementstyle=ConfineIn formatcopy=TRUE lockcomponents=FALSE outline 2475,1525 2750,1525 2750,1800 2475,1800
RoomDefinition +1V8_VLT1 [InComponentClass('+1V8_VLT1')] p5: confinementstyle=ConfineIn formatcopy=TRUE lockcomponents=FALSE outline 2750,925 2925,925 2925,1225 2750,1225
RoomDefinition +1V8_VLT2 [InComponentClass('+1V8_VLT2')] p6: confinementstyle=ConfineIn formatcopy=TRUE lockcomponents=FALSE outline 2550,925 2725,925 2725,1225 2550,1225
RoomDefinition P01 [InComponentClass('P01')] p7: confinementstyle=ConfineIn formatcopy=TRUE lockcomponents=FALSE outline 2675,0 3150,0 3150,300 2675,300
RoomDefinition MIC1 [InComponentClass('MIC1')] p8: confinementstyle=ConfineIn formatcopy=TRUE lockcomponents=FALSE outline 2225,1875 2525,1875 2525,2075 2225,2075
RoomDefinition P02 [InComponentClass('P02')] p9: confinementstyle=ConfineIn formatcopy=TRUE lockcomponents=FALSE outline 2200,0 2650,0 2650,314.49 2200,314.49
RoomDefinition +4V2_PS [InComponentClass('+4V2_PS')] p10: confinementstyle=ConfineIn formatcopy=TRUE lockcomponents=FALSE outline 400,1350 700,1350 700,1675 400,1675
RoomDefinition +1V8_PS [InComponentClass('+1V8_PS')] p11: confinementstyle=ConfineIn formatcopy=TRUE lockcomponents=FALSE outline 1450,225 1675,225 1675,325 1450,325
RoomDefinition RTC_XTAL [InComponentClass('RTC_XTAL')] p12: confinementstyle=ConfineIn formatcopy=TRUE lockcomponents=FALSE outline 475,850 600,850 600,950 475,950
RoomDefinition "U_TPS22810 2" [InComponentClass('U_TPS22810 2')] p13: confinementstyle=ConfineIn formatcopy=TRUE lockcomponents=FALSE outline 1425,25 1775,25 1775,250 1425,250
RoomDefinition P110 [InComponentClass('P110')] p14: confinementstyle=ConfineIn formatcopy=TRUE lockcomponents=FALSE outline 1225,1575 1750,1575 1750,2075 1225,2075
RoomDefinition STM32G473QETx [InComponentClass('STM32G473QETx')] p15: confinementstyle=ConfineIn formatcopy=TRUE lockcomponents=FALSE outline 525,375 1375,375 1375,1225 525,1225
RoomDefinition CODEC [InComponentClass('CODEC')] p16: confinementstyle=ConfineIn formatcopy=TRUE lockcomponents=FALSE outline 800,1700 1100,1700 1100,2075 800,2075
RoomDefinition FLASH [InComponentClass('FLASH')] p17: confinementstyle=ConfineIn formatcopy=TRUE lockcomponents=FALSE outline 800,25 1350,25 1350,275 800,275
RoomDefinition P128 [InComponentClass('P128')] p18: confinementstyle=ConfineIn formatcopy=TRUE lockcomponents=FALSE outline 295.28,570.87 570.87,570.87 570.87,826.77 295.28,826.77
RoomDefinition P103 [InComponentClass('P103')] p19: confinementstyle=ConfineIn formatcopy=TRUE lockcomponents=FALSE outline 625,400 1525,400 1525,1000 625,1000
RoomDefinition DISP_PS [InComponentClass('DISP_PS')] p20: confinementstyle=ConfineIn formatcopy=TRUE lockcomponents=FALSE outline 0,1375 400,1375 400,1900 0,1900
RoomDefinition P109 [InComponentClass('P109')] p21: confinementstyle=ConfineIn formatcopy=TRUE lockcomponents=FALSE outline 2275,175 3400,175 3400,1150 2275,1150
RoomDefinition PCB_Stackup [False] p22: confinementstyle=ConfineIn formatcopy=TRUE lockcomponents=FALSE outline 4700,195.12 5305,195.12 5305,10.12 4700,10.12
RoomDefinition +3V3_AUDIO_PS [InComponentClass('+3V3_AUDIO_PS')] p23: confinementstyle=ConfineIn formatcopy=TRUE lockcomponents=FALSE outline 550,1975 550,1700 750,1700 750,1975
RoomDefinition "U_DRV10975 3-ph Sensorless BLDC Motor Driver" [InComponentClass('U_DRV10975 3-ph Sensorless BLDC Motor Driver')] p24: confinementstyle=ConfineIn formatcopy=TRUE lockcomponents=FALSE outline 900,25 1475,25 1475,525 900,525
RoutingVias "PTH Via" [InDrillLayerPair('1-Sig/GND - 6-Sig/GND')] p1: holewidth=7.87 width=21.65 viastyle="Through Hole" minholewidth=7.87 minwidth=21.65 maxholewidth=7.87 maxwidth=21.65
RoutingVias "Buried Via" [InDrillLayerPair('4-Sig/Pwr - 5-Sig')] p2: holewidth=7.87 width=21.65 viastyle="Through Hole" minholewidth=7.87 minwidth=21.65 maxholewidth=7.87 maxwidth=21.65
RoutingVias "Micro Via Bottom" [InDrillLayerPair('5-Sig - 6-Sig/GND') or InDrillLayerPair('1-Sig/GND - 2-Sig')] p3: holewidth=3.94 width=11.81 viastyle="Through Hole" minholewidth=3.94 minwidth=11.81 maxholewidth=3.94 maxwidth=11.81
SilkToSilkClearance [All] p1: silktosilkclearance=1
SilkToSolderMaskClearance [IsPad] p1: minsilkscreentomaskgap=4 clearancetoexposedcopper=FALSE
SolderMaskExpansion [All] p1: expansion=2
Width "Schematic Width Constraint_4" [InNet('NetC31_2')] p1: maxlimit=44.61 minlimit=4.02 preferedwidth=10 toplayer_maxwidth=6.06 toplayer_prefwidth=4.96 midlayer1_minwidth=7.01 midlayer1_maxwidth=10 midlayer1_prefwidth=8.43 midlayer2_minwidth=24.72 midlayer2_maxwidth=34.21 midlayer2_prefwidth=29.13 midlayer3_minwidth=10 midlayer3_maxwidth=10 midlayer4_minwidth=10 midlayer4_maxwidth=10 bottomlayer_minwidth=32.36 bottomlayer_prefwidth=38.03 impedancedriven=TRUE minimp=45.000000 maximp=55.000000 favimp=50.000000
Width "Schematic Width Constraint_3" [InNet('NetC30_2')] p2: maxlimit=44.61 minlimit=4.02 preferedwidth=10 toplayer_maxwidth=6.06 toplayer_prefwidth=4.96 midlayer1_minwidth=7.01 midlayer1_maxwidth=10 midlayer1_prefwidth=8.43 midlayer2_minwidth=24.72 midlayer2_maxwidth=34.21 midlayer2_prefwidth=29.13 midlayer3_minwidth=10 midlayer3_maxwidth=10 midlayer4_minwidth=10 midlayer4_maxwidth=10 bottomlayer_minwidth=32.36 bottomlayer_prefwidth=38.03 impedancedriven=TRUE minimp=45.000000 maximp=55.000000 favimp=50.000000
Width "Schematic Width Constraint_2" [InNet('NetC29_2')] p3: maxlimit=44.61 minlimit=4.02 preferedwidth=10 toplayer_maxwidth=6.06 toplayer_prefwidth=4.96 midlayer1_minwidth=7.01 midlayer1_maxwidth=10 midlayer1_prefwidth=8.43 midlayer2_minwidth=24.72 midlayer2_maxwidth=34.21 midlayer2_prefwidth=29.13 midlayer3_minwidth=10 midlayer3_maxwidth=10 midlayer4_minwidth=10 midlayer4_maxwidth=10 bottomlayer_minwidth=32.36 bottomlayer_prefwidth=38.03 impedancedriven=TRUE minimp=45.000000 maximp=55.000000 favimp=50.000000
Width "Schematic Width Constraint_1" [InNet('NetC28_2')] p4: maxlimit=44.61 minlimit=4.02 preferedwidth=10 toplayer_maxwidth=6.06 toplayer_prefwidth=4.96 midlayer1_minwidth=7.01 midlayer1_maxwidth=10 midlayer1_prefwidth=8.43 midlayer2_minwidth=24.72 midlayer2_maxwidth=34.21 midlayer2_prefwidth=29.13 midlayer3_minwidth=10 midlayer3_maxwidth=10 midlayer4_minwidth=10 midlayer4_maxwidth=10 bottomlayer_minwidth=32.36 bottomlayer_prefwidth=38.03 impedancedriven=TRUE minimp=45.000000 maximp=55.000000 favimp=50.000000
Width "Schematic Width Constraint" [InNet('NetC27_2')] p5: maxlimit=44.61 minlimit=4.02 preferedwidth=10 toplayer_maxwidth=6.06 toplayer_prefwidth=4.96 midlayer1_minwidth=7.01 midlayer1_maxwidth=10 midlayer1_prefwidth=8.43 midlayer2_minwidth=24.72 midlayer2_maxwidth=34.21 midlayer2_prefwidth=29.13 midlayer3_minwidth=10 midlayer3_maxwidth=10 midlayer4_minwidth=10 midlayer4_maxwidth=10 bottomlayer_minwidth=32.36 bottomlayer_prefwidth=38.03 impedancedriven=TRUE minimp=45.000000 maximp=55.000000 favimp=50.000000
Width [All] p6: maxlimit=200 minlimit=6 preferedwidth=10
21 further rules are at their usual default settings.

## Classes and differential pairs
channel class EC06-IDC_6-pin_Castellated_Board-Edge_Connector: P01 P02
component class FLASH: C104 R119 R120 R121 U32
component class DISP_PS: C134 C135 C136 C137 C138 D9 D10 FB6 L4 R131 U38
channel class TPSM82822_2A_Buck_Module: +3V3_AUDIO_PS +3V3_PS
component class P128: C93 C94 NT7 NT8 U30
component class +3V3_AUDIO_PS: C124 C125 C126 C127 C128 R125 R126 R127 U36
component class "U_TPS22810 2": C121 C122 C123 R123 R124 U35
component class P103: C71 C72 C73 C74 C75 C76 C77 C78 C79 C80 D7 FB4 L3 Q9 R100 R101 R102 R103 R104 R105 R106 U24 U25
component class STM32G473CETx: C64 C65 C66 NT2 NT3 Q8 R9 R10 R22 R23 R89 R90 R91 R92 R93 R94 R95 R96
net class PG[0..9]: PG0 PG1 PG2 PG3 PG4 PG5 PG6 PG7 PG8 PG9
net class PF[0..15]: PF0 PF1 PF2 PF3 PF4 PF6 PF7 PF14 PF15
net class PE[0..15]: PE0 PE1 PE2 PE3 PE4 PE5 PE6 PE7 PE8 PE9 PE10 PE11 PE12 PE13 PE14 PE15
net class PD[0..15]: PD0 PD1 PD2 PD7 PD8 PD9 PD10 PD12 PD13 PD14 PD15
component class STM32G473QETx: C106 C107 C108 C109 C110 C111 C112 C113 C114 C115 C116 C117 C118 C119 C120 FB5 R122 U34
component class RTC_XTAL: C105 U33
component class MIC1: C139 FB7 R132 U39
component class MCU: C105 U33
component class I2C_SW: R5 R6 R7 R8
net class BG95_PWR: NetC19_1 NetC20_1 NetC20_2
component class TCPP: C61 C63 C147 C148 Q7 R80 R81 U41
component class "U_DRV10975 3-ph Sensorless BLDC Motor Driver": C85 C86 C87 C88 C89 C90 D8 J1 R107 R108 R109 R110 U28
component class CODEC: C95 C96 C97 C98 C99 R114 R115 R116 U31
component class PCB_FEATURE: Logo
channel class TS3USB3031_2-ch_2p3t_Multiplexer: UART_MUX USB_MUX
net class QSPI: PE10 PE11 PE12 PE13 PE14 PE15
net class PC[0..15]: PC0 PC1 PC2 PC3 PC4 PC5 PC6 PC7 PC8 PC9 PC10 PC11 PC12 PC13 PC14
net class PB[0..15]: PB0 PB1 PB2 PB3 PB4 PB5 PB6 PB7 PB8 PB9 PB10 PB11 PB12 PB13 PB15
net class PA[0..15]: PA0 PA1 PA2 PA3 PA4 PA5 PA6 PA7 PA8 PA9 PA10 PA11 PA12 PA13 PA14 PA15
net class GPIO[0..21]: GPIO0 GPIO1 GPIO2 GPIO3 GPIO4 GPIO5 GPIO6 GPIO7 GPIO8 GPIO9 GPIO10 GPIO18 GPIO19 GPIO20 GPIO21
component class USB_MUX: R87 R88
component class +4V2_PS: C49 C50 C51 C52 L2 R77 R78 R79 U15
component class P110: C43 C44 C45 C46 C47 C48 R64 R65 R66 R67 R68 R69 R70 R71 R72 R73 R74 R75 R76 U14
component class P109: C14 C17 C18 C19 C20 C21 C22 C23 C24 C25 C26 C27 C28 C29 C30 C32 D4 D5 FB1 FB2 FB3 Q2 Q3 Q4 R33 R34 R35 R36 R37 R38 R43 R44 R47 R48 R49 R50 TP26 TP27 U6 U7 U8 X2 X3
component class U_ESP32-WROOM32D_Module: Q5 Q6 R51 R52 R53
component class P01: C145 D11 X6
component class P02: C146 D12 X7
component class USB-to-UART_Bridge: C129 C130 C131 C132 C133 R128 R129 R130 U37
component class FiducialMark: FID1 FID2 FID3
component class P105: C67 U22
net class B2_[0..7]: B2_0 B2_1 B2_2 B2_3 B2_4 B2_5 B2_6 B2_7
net class B1_[0..7]: B1_0 B1_1 B1_2 B1_3 B1_4 B1_5 B1_6 B1_7
net class A2_[0..7]: A2_0 A2_1 A2_2 A2_3 A2_4 A2_5 A2_6 A2_7
net class A1_[0..7]: A1_0 A1_1 A1_2 A1_3 A1_4 A1_5 A1_6 A1_7
component class UART_MUX: R33 R34
component class +1V8_VLT1: C57 C58 U19
component class +1V8_VLT2: C55 C56 U18
channel class "TXB0108 Voltage_Level_Translator": +1V8_VLT1 +1V8_VLT2
component class TestPoint: TP1 TP2 TP3 TP4 TP5 TP6 TP7 TP8 TP9 TP10 TP11 TP12 TP13 TP14 TP15 TP16 TP17 TP18 TP19 TP20 TP21 TP22 TP23 TP24 TP25 TP26 TP27 TP28 TP?
component class +1V8_PS: C83 C84 R112 U27
component class "Net Tie": J1 NT1 NT4 NT5 NT6
component class P26: C68 C69 C70 R97 R98 R99 TP28 U23
component class +3V3_PS: C140 C141 C142 C143 C144 R111 R133 R134 R135 U40
differential pair D: +D_P -D_N
differential pair D3_USB_MUX: +D3_USB_MUX_P -D3_USB_MUX_N
differential pair D2_USB_MUX: +D2_USB_MUX_P -D2_USB_MUX_N
differential pair D1_USB_MUX: +D1_USB_MUX_P -D1_USB_MUX_N
differential pair CONN_D: +CONN_D_P -CONN_D_N

## Components (designator, comment, footprint, x,y, rotation, side; value= is the part's Value field where it differs from the comment)
C1 "CAP CER 1UF 16V X5R 0603" C0603 1095,1275 r0 bottom value=1uF (schematic designator C4)
C2 "CAP CER 0.047UF 50V X7R 0402" C0402 1275,1200 r270 bottom (schematic designator C5)
C3 "CAP CER 4.7UF 10V X5R 0603" C0603 1225,1180 r90 bottom (schematic designator C6)
C4 "CAP CER 10UF 25V X7R 1206" C1206 1145,1145 r90 bottom (schematic designator C7)
C5 "CAP CER 10uF X7R 10% 0805" C0805 1350,1510 r270 bottom (schematic designator C8)
C6 "CAP CER 10uF X7R 10% 0805" C0805 1425,1250 r180 bottom (schematic designator C9)
C7 "CAP CER 10uF X7R 10% 0805" C0805 1425,1400 r180 bottom (schematic designator C10)
C8 "CAP CER 10uF X7R 10% 0805" C0805 1425,1325 r180 bottom (schematic designator C11)
C9 "CAP ALUM 68 UF 20% 25 V SMD" WCAP-ASLI_6.3X5.5 200,1150 r180 bottom (schematic designator C16)
C10 "CAP ALUM 68 UF 20% 25 V SMD" WCAP-ASLI_6.3X5.5 600,1150 r0 bottom (schematic designator C17)
C11 "CAP ALUM 68 UF 20% 25 V SMD" WCAP-ASLI_6.3X5.5 200,785 r180 bottom (schematic designator C18)
C12 "CAP CER 10UF 16V X5R 0603" C0603 175,1950 r180 bottom (schematic designator C34)
C13 "CAP CER 0.1UF 16V X7R 0402" C0402 195,2000 r180 bottom (schematic designator C35)
C14 "CAP CER 0.1UF 50V X7R 0402" C0402 3025,290 r180 top (schematic designator C36)
C15 "CAP CER 0.1UF 50V X7R 0402" C0402 225,75 r0 top (schematic designator C52)
C16 "CAP CER 0.1UF 50V X7R 0402" C0402 270,600 r270 top (schematic designator C53)
C17 "CAP CER 0.1UF 50V X7R 0402" C0402 2395,850 r270 top (schematic designator C42)
C18 "CAP CER 2.2UF 6.3V X5R 0402" C0402 2325,850 r270 top (schematic designator C43)
C19 "CAP CER 0.1UF 50V X7R 0402" C0402 3315,770 r0 bottom (schematic designator C44)
C20 "CAP CER 0.1UF 50V X7R 0402" C0402 2515,1055 r270 bottom (schematic designator C45)
C21 "CAP CER 33PF 50V C0G/NPO 0402" C0402 3315,820 r0 bottom (schematic designator C46)
C22 "CAP CER 33PF 50V C0G/NPO 0402" C0402 2465,1055 r270 bottom (schematic designator C47)
C23 "CAP CER 10PF 50V C0G/NP0 0402" C0402 3315,870 r0 bottom (schematic designator C48)
C24 "CAP CER 10PF 50V C0G/NP0 0402" C0402 2415,1055 r270 bottom (schematic designator C49)
C25 "CAP ALUM 100 UF 20% 6.3 V SMD" WCAP-ASLI_5X5.5 825,1590 r90 bottom (schematic designator C50)
C26 "CAP ALUM 100 UF 20% 6.3 V SMD" WCAP-ASLI_5X5.5 875,1325 r0 bottom (schematic designator C51)
C27 "DNP*" C0402 3310,360 r180 bottom (schematic designator C37)
C28 "DNP*" C0402 3295,935 r90 bottom (schematic designator C38)
C29 "DNP*" C0402 3310,210 r180 bottom (schematic designator C39)
C30 "DNP*" C0402 3335,935 r90 bottom (schematic designator C40)
C31 "C 100pF 50V C0G, NP0 0402" C0402 3335,1055 r90 bottom (schematic designator C41)
C32 "CAP CER 10nF 25V X7R 10% 0402" C0402 2500,225 r0 top (schematic designator C54)
C33 "CAP CER 0.1UF 50V X7R 0402" C0402 2790,575 r180 top (schematic designator C55)
C34 "CAP CER 0.1UF 50V X7R 0402" C0402 1700,600 r180 top (schematic designator C19)
C35 "CAP CER 0.1UF 50V X7R 0402" C0402 1700,970 r180 top (schematic designator C20)
C36 "CAP CER 0.1UF 50V X7R 0402" C0402 1400,1755 r180 bottom (schematic designator C21)
C37 "CAP CER 1UF 6.3V X5R 0402" C0402 1550,665 r0 bottom (schematic designator C22)
C38 "CAP CER 1UF 6.3V X5R 0402" C0402 1550,1055 r0 bottom (schematic designator C23)
C39 "CAP CER 1UF 6.3V X5R 0402" C0402 1375,1885 r180 bottom (schematic designator C24)
C40 "DNP*" C0402 1550,625 r0 bottom (schematic designator C25)
C41 "DNP*" C0402 1550,1015 r0 bottom (schematic designator C26)
C42 "DNP*" C0402 1375,2005 r180 bottom (schematic designator C27)
C43 "CAP CER 10nF 25V X7R 10% 0402" C0402 1275,1925 r0 top (schematic designator C1)
C44 "CAP CER 1000PF 50V X7R 0402" C0402 1275,1805 r0 top (schematic designator C2)
C45 "CAP CER 1UF 6.3V X5R 0402" C0402 1280,2090 r0 top (schematic designator C3)
C46 "CAP CER 0.022UF 25V X7R 0402" C0402 1360,2010 r180 top (schematic designator C4)
C47 "CAP CER 22UF 25V X5R 0805" C0805 1560,1865 r0 top (schematic designator C5)
C48 "CAP CER 2.2UF 16V X5R 0603" C0603 1555,1795 r0 top (schematic designator C6)
C49 "CAP CER 10uF X7R 10% 0805" C0805 610,1635 r0 bottom (schematic designator C1)
C50 "CAP CER 0.1UF 50V X7R 0402" C0402 435,1475 r90 bottom (schematic designator C2)
C51 "CAP CER 22UF 10V X5R 0805" C0805 610,1485 r180 bottom (schematic designator C3)
C52 "CAP CER 22UF 10V X5R 0805" C0805 610,1560 r180 bottom (schematic designator C4)
C53 "CAP CER 0.1UF 50V X7R 0402" C0402 2465,1230 r90 top (schematic designator C1)
C54 "CAP CER 0.1UF 50V X7R 0402" C0402 1475,1295 r0 top (schematic designator C1)
C55 "CAP CER 0.1UF 50V X7R 0402" C0402 2630,970 r90 top (schematic designator C28)
C56 "CAP CER 0.1UF 50V X7R 0402" C0402 2635,1180 r90 top (schematic designator C30)
C57 "CAP CER 0.1UF 50V X7R 0402" C0402 2825,970 r90 top (schematic designator C28)
C58 "CAP CER 0.1UF 50V X7R 0402" C0402 2830,1180 r90 top (schematic designator C30)
C59 "CAP CER 2.2UF 6.3V X5R 0402" C0402 700,375 r180 bottom (schematic designator C1)
C60 "CAP CER 0.1UF 50V X7R 0402" C0402 700,335 r180 bottom (schematic designator C2)
C61 "CAP CER 220PF 50V X7R 0402" C0402 275,1440 r180 top (schematic designator C1)
C62 "CAP CER 4.7UF 35V X7R 0805" C0805 175,875 r180 top (schematic designator C2)
C63 "CAP CER 220PF 50V X7R 0402" C0402 75,1400 r0 top (schematic designator C3)
C64 "CAP CER 0.1UF 50V X7R 0402" C0402 575,700 r0 top (schematic designator C13)
C65 "CAP CER 0.1UF 50V X7R 0402" C0402 575,740 r0 top (schematic designator C14)
C66 "CAP CER 0.1UF 50V X7R 0402" C0402 575,660 r0 top (schematic designator C15)
C67 "CAP CER 0.1UF 50V X7R 0402" C0402 2590,1365 r270 bottom (schematic designator C1)
C68 "CAP CER 0.1UF 16V X7R 0402" C0402 2240,1610 r270 bottom (schematic designator C1)
C69 "CAP CER 0.1UF 16V X7R 0402" C0402 2320,1610 r270 bottom (schematic designator C2)
C70 "CAP 11MF 3.3V SURFACE MNT" CAPCP3225X100N 2300,1710 r0 bottom (schematic designator C3)
C71 "CAP CER 0.1UF 50V X7R 0402" C0402 1375,935 r180 bottom (schematic designator C1)
C72 "CAP CER 0.1UF 50V X7R 0402" C0402 1510,855 r90 bottom (schematic designator C2)
C73 "CAP CER 22UF 25V X5R 0805" C0805 665,775 r270 bottom (schematic designator C3)
C74 "CAP CER 0.1UF 50V X7R 0402" C0402 1295,935 r0 bottom (schematic designator C4)
C75 "CAP CER 1800PF 50V X7R 0402" C0402 1450,835 r180 bottom (schematic designator C5)
C76 "CAP CER 1UF 16V X5R 0402" C0402 1440,480 r180 bottom (schematic designator C6)
C77 "CAP CER 22UF 25V X5R 0805" CAPC2012X14N 1190,775 r270 bottom (schematic designator C7)
C78 "CAP CER 22UF 25V X5R 0805" C0805 860,475 r270 bottom (schematic designator C8)
C79 "CAP CER 22UF 25V X5R 0805" C0805 780,475 r270 bottom (schematic designator C9)
C80 "CAP CER 22UF 25V X5R 0805" C0805 700,475 r270 bottom (schematic designator C10)
C81 "CAP CER 1UF 16V X5R 0402" C0402 1550,785 r0 top (schematic designator C1)
C82 "CAP CER 0.1UF 50V X7R 0402" C0402 1550,825 r0 top (schematic designator C2)
C83 "CAP CER 2.2UF 6.3V X5R 0402" C0402 1520,275 r270 top (schematic designator C1)
C84 "CAP CER 2.2UF 6.3V X5R 0402" C0402 1630,275 r270 top (schematic designator C2)
C85 "CAP CER 0.1UF 50V X7R 0402" C0402 1245,125 r270 bottom (schematic designator C1)
C86 "CAP CER 1UF 6.3V X5R 0402" C0402 1120,340 r0 bottom (schematic designator C2)
C87 "CAP CER 1UF 6.3V X5R 0402" C0402 1120,300 r0 bottom (schematic designator C3)
C88 "CAP CER 0.1UF 50V X7R 0402" C0402 1295,125 r90 bottom (schematic designator C4)
C89 "CAP CER 22UF 25V X5R 0805" C0805 1355,100 r270 bottom (schematic designator C5)
C90 "CAP CER 10uF X7R 10% 0805" C0805 1040,290 r90 bottom (schematic designator C6)
C91 "CGA2B3X7R1H104K050BB" C0402 1175,605 r90 bottom (schematic designator C1)
C92 "CGA2B3X7R1H104K050BB" C0402 1125,375 r0 bottom (schematic designator C2)
C93 "CAP CER 0.1UF 50V X7R 0402" C0402 355,630 r90 top (schematic designator C1)
C94 "CAP CER 0.1UF 50V X7R 0402" C0402 420,630 r270 top (schematic designator C2)
C95 "CAP CER 10nF 25V X7R 10% 0402" C0402 1045,1815 r180 top (schematic designator C28)
C96 "CAP CER 10PF 50V C0G/NP0 0402" C0402 1005,1735 r90 top (schematic designator C29)
C97 "C 100pF 50V C0G, NP0 0402" CAP_0402 885,1735 r90 top (schematic designator C30)
C98 "CAP CER 10nF 25V X7R 10% 0402" C0402 845,1735 r90 top (schematic designator C31)
C99 "CAP CER 0.1UF 50V X7R 0402" C0402 925,1735 r90 top (schematic designator C32)
C100 "CAP CER 1UF 16V X5R 0402" C0402 3335,1640 r180 bottom (schematic designator C1)
C101 "CAP CER 10UF 16V X5R 0603" C0603 3250,1790 r0 top (schematic designator C2)
C102 "CAP CER 10UF 16V X5R 0603" C0603 3250,1725 r0 top (schematic designator C3)
C103 "CAP CER 0.1UF 16V X7R 0402" C0402 3335,1760 r180 bottom (schematic designator C4)
C104 "CAP CER 0.1UF 50V X7R 0402" C0402 850,75 r180 top (schematic designator C1)
C105 "CAP CER 0.1UF 50V X7R 0402" C0402 510,890 r90 top (schematic designator C12)
C106 "CAP CER 0.1UF 50V X7R 0402" C0402 575,970 r0 top (schematic designator C2)
C107 "CAP CER 10uF X7R 10% 0805" C0805 1300,470 r0 top (schematic designator C7)
C108 "CAP CER 0.1UF 50V X7R 0402" C0402 575,840 r0 top (schematic designator C3)
C109 "CAP CER 0.1UF 50V X7R 0402" C0402 1325,770 r0 top (schematic designator C8)
C110 "CAP CER 0.1UF 50V X7R 0402" C0402 575,565 r0 top (schematic designator C4)
C111 "CAP CER 0.1UF 50V X7R 0402" C0402 1325,1025 r0 top (schematic designator C9)
C112 "CAP CER 0.1UF 50V X7R 0402" C0402 925,420 r90 top (schematic designator C5)
C113 "CAP CER 0.1UF 50V X7R 0402" C0402 975,1170 r90 top (schematic designator C10)
C114 "CAP CER 0.1UF 50V X7R 0402" C0402 1195,420 r270 top (schematic designator C6)
C115 "CAP CER 0.1UF 50V X7R 0402" C0402 705,1170 r90 top (schematic designator C11)
C116 "CAP CER 0.1UF 50V X7R 0402" C0402 845,420 r90 top (schematic designator C12)
C117 "CAP CER 1UF 16V X5R 0402" C0402 805,420 r90 top (schematic designator C13)
C118 "CAP CER 0.1UF 50V X7R 0402" C0402 885,420 r90 top (schematic designator C14)
C119 "CAP CER 1UF 16V X5R 0402" C0402 765,420 r90 top (schematic designator C15)
C120 "CAP CER 0.1UF 50V X7R 0402" C0402 200,800 r180 top (schematic designator C1)
C121 "CAP CER 2.2UF 35V X5R 0603" C0603 1750,185 r90 top (schematic designator C1)
C122 "CAP CER 0.1UF 16V X7R 0402" C0402 1540,50 r180 top (schematic designator C2)
C123 "CAP CER 2.2UF 35V X5R 0603" C0603 1470,140 r270 top (schematic designator C3)
C124 "CAP CER 10UF 16V X5R 0603" CAPC1608X08N_0603 625,1750 r270 top (schematic designator C1)
C125 "CAP CER 10UF 16V X5R 0603" CAPC1608X08N_0603 575,1750 r270 top (schematic designator C2)
C126 "CAP CER 100PF 50V C0G/NPO 0402" C0402 710,1940 r90 top (schematic designator C3)
C127 "CAP CER 10UF 16V X5R 0603" CAPC1608X08N_0603 675,1750 r270 top (schematic designator C4)
C128 "CAP CER 10UF 16V X5R 0603" CAPC1608X08N_0603 725,1750 r270 top (schematic designator C5)
C129 "CAP CER 1UF 16V X5R 0402" C0402 2450,1650 r0 bottom (schematic designator C1)
C130 "CAP CER 0.1UF 50V X7R 0402" C0402 2565,1510 r90 bottom (schematic designator C2)
C131 "CAP CER 1UF 16V X5R 0402" C0402 2450,1510 r90 bottom (schematic designator C3)
C132 "CAP CER 1UF 16V X5R 0402" C0402 2490,1510 r90 bottom (schematic designator C4)
C133 "CAP CER 0.1UF 50V X7R 0402" C0402 2530,1510 r90 bottom (schematic designator C5)
C134 "CAP CER 10UF 16V X5R 0603" C0603 175,1865 r180 bottom (schematic designator C1)
C135 "CAP CER 0.1UF 50V X7R 0402" C0402 50,1450 r90 bottom (schematic designator C2)
C136 "CAP CER 10UF 16V X7R 0805" C0805 125,1575 r0 bottom (schematic designator C3)
C137 "CAP CER 10UF 16V X5R 0603" C0603 325,1685 r270 bottom (schematic designator C4)
C138 "CAP CER 10UF 16V X5R 0603" C0603 300,1455 r270 bottom (schematic designator C5)
C139 "CAP CER 0.1UF 50V X7R 0402" C0402 2425,2050 r180 top (schematic designator C33)
C140 "CAP CER 10UF 16V X5R 0603" CAPC1608X08N_0603 625,1450 r270 top (schematic designator C1)
C141 "CAP CER 10UF 16V X5R 0603" CAPC1608X08N_0603 575,1450 r270 top (schematic designator C2)
C142 "CAP CER 100PF 50V C0G/NPO 0402" C0402 695,1640 r90 top (schematic designator C3)
C143 "CAP CER 10UF 16V X5R 0603" CAPC1608X08N_0603 675,1450 r270 top (schematic designator C4)
C144 "CAP CER 10UF 16V X5R 0603" CAPC1608X08N_0603 725,1450 r270 top (schematic designator C5)
C145 "CAP CER 0.1UF 50V X7R 0402" C0402 3080,85 r270 bottom (schematic designator C1)
C146 "CAP CER 0.1UF 50V X7R 0402" C0402 2590,85 r270 bottom (schematic designator C1)
C147 "CAP CER 1UF 16V X5R 0402" C0402 550,1185 r180 top (schematic designator C1)
C148 "CAP CER 0.1UF 50V X7R 0402" C0402 370,1295 r270 top (schematic designator C2)
D1 "\"CHG\"" LED_0603 50,850 r270 top (schematic designator D2)
D2 "ESDA7P120-1U1M" ST_QFN_1610 1475,1500 r90 bottom (schematic designator D3)
D3 "NSR0140P2T5G" SODFL100X40-2N 650,1725 r0 bottom (schematic designator D4)
D4 "MM3Z5V1C" SOD-323F 2900,315 r180 top (schematic designator D5)
D5 "ESDA7P120-1U1M" ST_QFN_1610 615,1385 r90 bottom (schematic designator D6)
D6 "ESDA25P35-1U1M" ST_QFN_1610 375,1050 r270 top (schematic designator D1)
D7 "PMEG4050EP,115" SOD-128 1025,475 r0 bottom (schematic designator D1)
D8 "Zener Diode 6.2V 2.5W ±5% Surface Mount SOD-123FL" SOD-123FL 1085,175 r180 bottom (schematic designator D1)
D9 "STPS120MF" SODFL375X95-2N 290,1570 r180 bottom (schematic designator D1)
D10 "MMSZ5226B-7-F" SOD-123 400,1825 r0 bottom (schematic designator D2)
D11 "SMF05CT1G" SOT363_SOP65P210X265-6N 2935,110 r0 bottom (schematic designator D1)
D12 "SMF05CT1G" SOT363_SOP65P210X265-6N 2440,110 r0 bottom (schematic designator D1)
ESP32_MOD "ESP32-C3-MINI-1-H4" MODULE_ESP32-C3-MINI-1 3025,1675 r180 bottom
FB1 "Not Fitted in BG95-M3_Global Variant" L0603 675,1385 r90 bottom (schematic designator FB2)
FB2 "MPZ1608S300ATAH0" L0603 3300,675 r270 bottom (schematic designator FB3)
FB3 "MPZ1608S300ATAH0" L0603 2350,1075 r90 bottom (schematic designator FB4)
FB4 "FERRITE BEAD 1 KOHM 0402 1LN" L0402 1360,480 r0 bottom (schematic designator FB1)
FB5 "FERRITE BEAD 1 KOHM 0402 1LN" L0402 725,420 r270 top (schematic designator FB1)
FB6 "FERRITE BEAD 470 OHM 0603 1LN" L0603 40,1725 r90 bottom (schematic designator FB1)
FB7 "FERRITE BEAD 1 KOHM 0402 1LN" L_0402 2350,2050 r0 top (schematic designator FB1)
FID1 "N/A" FIDUCIAL 375,900 r0 bottom
FID2 "N/A" FIDUCIAL 3225,1325 r270 bottom
FID3 "N/A" FIDUCIAL 710,80 r270 bottom
G1 "Logo_ESD" Logo_ESD 3250,430 r270 top
Ground&PowerPlanes_1 "Number & Stacking Stripe" SIGNAL-1 4725,70 r0 top
Ground&PowerPlanes_4 "Number & Stacking Stripe" SIGNAL-4 4725,70 r0 top
Ground&PowerPlanes_5 "Number & Stacking Stripe" SIGNAL-5 4725,70 r0 top
Ground&PowerPlanes_6 "Number & Stacking Stripe" SIGNAL-6 4725,70 r0 bottom
J1 "Net Tie" "Net Tie 6x30mil" 1310,515 r270 bottom net-tie
L1 "FIXED IND 1UH 5A 24 MOHM SMD" IND_IHLP-1212B00 1375,1140 r0 bottom
L2 "FIXED IND 1UH 2.4A 54 MOHM MAX" IND_WE_LQSH_3012 475,1600 r270 bottom (schematic designator L1)
L3 "FIXED IND COUIPLED 2.2UH 3.2A 22 MOHM SMD" IND_MSD1048H 925,775 r180 bottom (schematic designator L1)
L4 "FIXED IND COUIPLED 6.8UH 1.2A 160 mOHM SMD" IND_LPD5030 175,1725 r180 bottom (schematic designator L1)
Logo "Logo ACME_CPU" LOGO_ACME_CPU 3275,880 r270 top
NT1 "Net Tie" "Net Tie 8x30mil" 1160,1505 r90 bottom net-tie (schematic designator NT2)
NT2 "Net Tie" "NET TIE 6X30MIL" 1285,995 r0 top net-tie (schematic designator NT3)
NT3 "Net Tie" "NET TIE 6X30MIL" 1285,980 r0 top net-tie (schematic designator NT4)
NT4 "Net Tie" "Net Tie 6x30mil" 1500,940 r0 top net-tie (schematic designator NT1)
NT5 "Net Tie" "NET TIE 6X30MIL" 2390,1885 r90 top net-tie
NT6 "Net Tie" "Net Tie 6x30mil" 875,2035 r270 top net-tie
NT7 "Net Tie" "Net Tie 6x30mil" 395,800 r90 top net-tie
NT8 "Net Tie" "Net Tie 6x30mil" 330,800 r90 top net-tie
P10 "USB" MOLEX_2012670005 156.3,1150 r270 top
P16 "DC Motor" CONN_JST_S4B-ZR-SM4A-TF(LF)(SN) 1675,250 r270 bottom
P17 "BLDC Motor" CONN_JST_S5B-ZR-SM4A-TF(LF)(SN) 1560,250 r270 bottom
P18 "BATT" CONN_JST_S2B-ZR-SM4A-TF(LF)(SN) 1675,1450 r270 bottom
P19 "THERMISTOR NTC 10KOHM 3380K 0603" R0603 1240,1575 r180 bottom
P20 "S201" CONN_0545500571 1675,675 r270 bottom
P25 "Stepper Motor" CONN_JST_SM4B-NSHSS-TB(LF)(SN) 1650,1825 r270 bottom
P28 "S202" CONN_0545500571 1675,1050 r270 bottom
Q1 "DMN32D2LV-7" SON_400UV-7_DIO 1725,425 r180 top (schematic designator Q3)
Q2 "DTC143ZET1G" SOT-416FL_ONS 2550,300 r270 top (schematic designator Q6)
Q3 "DTC143ZET1G" SOT-416FL_ONS 2450,300 r270 top (schematic designator Q7)
Q4 "DMN32D2LV-7" SON_400UV-7_DIO 2790,650 r0 top (schematic designator Q8)
Q5 "BC847CW,115" SOT-323 2865,1760 r90 top (schematic designator Q4)
Q6 "BC847CW,115" SOT-323 2865,1555 r270 top (schematic designator Q5)
Q7 "DMN32D2LV-7" SON_400UV-7_DIO 175,1420 r0 top (schematic designator Q1)
Q8 "EM6M2T2R" SON_400UV-7_DIO 500,855 r0 bottom (schematic designator Q2)
Q9 "BC847CW,115" SOT-323 1275,675 r90 bottom (schematic designator Q1)
R1 "RC0402FR-071KL" R0402 50,745 r270 top value=22k (schematic designator R12)
R2 "RES SMD 10K OHM 1% 1/16W 0402" R0402 1195,1505 r90 bottom (schematic designator R13)
R3 "RES SMD 31.6K OHM 1% 1/16W 0402" R0402 1260,1525 r0 bottom (schematic designator R14)
R4 "RES SMD 5.36K OHM 1% 1/16W 0402" R0402 1260,1485 r0 bottom (schematic designator R15)
R5 "RES SMD 4.75K OHM 1% 1/16W 0402" R0402 1700,750 r180 top (schematic designator R16)
R6 "RES SMD 4.75K OHM 1% 1/16W 0402" R0402 1765,715 r90 top (schematic designator R17)
R7 "RES SMD 4.75K OHM 1% 1/16W 0402" R0402 1700,1120 r180 top (schematic designator R18)
R8 "RES SMD 4.75K OHM 1% 1/16W 0402" R0402 1765,1085 r90 top (schematic designator R19)
R9 "RES SMD 2.7K OHM 1% 1/16W 0402" R0402 1700,850 r0 top (schematic designator R20)
R10 "RES SMD 2.7K OHM 1% 1/16W 0402" R0402 1700,890 r0 top (schematic designator R21)
R11 "RES SMD 100K OHM 1% 1/16W 0402" R0402 1550,570 r180 top (schematic designator R22)
R12 "RES SMD 100K OHM 1% 1/16W 0402" R0402 1550,610 r180 top (schematic designator R23)
R13 "RES SMD 100K OHM 1% 1/16W 0402" R0402 1550,690 r180 top (schematic designator R24)
R14 "RES SMD 100K OHM 1% 1/16W 0402" R0402 2400,1245 r0 bottom (schematic designator R25)
R15 "RES SMD 100K OHM 1% 1/16W 0402" R0402 2400,1205 r0 bottom (schematic designator R26)
R16 "RES SMD 100K OHM 1% 1/16W 0402" R0402 1700,930 r180 top (schematic designator R27)
R17 "RES SMD 100K OHM 1% 1/16W 0402" R0402 2630,85 r90 bottom (schematic designator R28)
R18 "RES SMD 100K OHM 1% 1/16W 0402" R0402 550,780 r0 bottom (schematic designator R29)
R19 "RES SMD 100K OHM 1% 1/16W 0402" R0402 1550,705 r180 bottom (schematic designator R30)
R20 "RES SMD 100K OHM 1% 1/16W 0402" R0402 1550,1095 r180 bottom (schematic designator R31)
R21 "RES SMD 100K OHM 1% 1/16W 0402" R0402 1375,1925 r0 bottom (schematic designator R32)
R22 "RES SMD 0 OHM JUMPER 1/16W 0402" R0402 1400,915 r180 top (schematic designator R33)
R23 "RES SMD 0 OHM JUMPER 1/16W 0402" R0402 1400,960 r180 top (schematic designator R34)
R24 "RES SMD 10K OHM 1% 1/16W 0402" R0402 1625,405 r180 top (schematic designator R43)
R25 "RES SMD 10K OHM 1% 1/16W 0402" R0402 1625,445 r180 top (schematic designator R44)
R26 "RES SMD 0 OHM JUMPER 1/16W 0402" R0402 1520,405 r180 top (schematic designator R45)
R27 "RES SMD 0 OHM JUMPER 1/16W 0402" R0402 1520,445 r180 top (schematic designator R46)
R28 "DNP*" R0402 1625,485 r180 top (schematic designator R47)
R29 "RES SMD 10K OHM 1% 1/16W 0402" R0402 1520,365 r180 top (schematic designator R48)
R30 "RES SMD 10K OHM 1% 1/16W 0402" R0402 1520,485 r180 top (schematic designator R49)
R31 "DNP*" R0402 1625,365 r0 top (schematic designator R50)
R32 "RES SMD 1K OHM 1% 1/16W 0402" R0402 1550,650 r0 top (schematic designator R62)
R33 "RES SMD 10K OHM 1% 1/16W 0402" R0402 2505,1230 r270 top (schematic designator R70)
R34 "RES SMD 10K OHM 1% 1/16W 0402" R0402 2545,1230 r270 top (schematic designator R71)
R35 "RES SMD 0 OHM JUMPER 1/16W 0402" R0402 2895,260 r0 top (schematic designator R72)
R36 "DNP*" R0402 2895,220 r0 top (schematic designator R73)
R37 "DNP*" R0402 2895,180 r0 top (schematic designator R74)
R38 "RES SMD 10K OHM 1% 1/16W 0402" R0402 3025,330 r180 top (schematic designator R75)
R39 "RES SMD 15K OHM 1% 1/16W 0402" R0402 260,685 r270 top (schematic designator R78)
R40 "RES SMD 0 OHM JUMPER 1/16W 0402" R0402 220,685 r270 top (schematic designator R79)
R41 "RES SMD 0 OHM JUMPER 1/16W 0402" R0402 180,685 r270 top (schematic designator R80)
R42 "RES SMD 0 OHM JUMPER 1/16W 0402" R0402 140,685 r270 top (schematic designator R81)
R43 "RES SMD 0 OHM JUMPER 1/16W 0402" R0402 3290,285 r270 bottom (schematic designator R76)
R44 "RES SMD 0 OHM JUMPER 1/16W 0402" R0402 3315,995 r0 bottom (schematic designator R77)
R45 "RES SMD 5.1K OHM 1% 1/16W 0402" R0402 2325,760 r270 top (schematic designator R82)
R46 "RES SMD 100K OHM 1% 1/16W 0402" R0402 2325,680 r90 top (schematic designator R83)
R47 "RES SMD 10K OHM 1% 1/16W 0402" R0402 2690,670 r180 top (schematic designator R84)
R48 "RES SMD 100K OHM 1% 1/16W 0402" R0402 2690,630 r0 top (schematic designator R85)
R49 "RES SMD 10K OHM 1% 1/16W 0402" R0402 2890,630 r0 top (schematic designator R86)
R50 "RES SMD 100K OHM 1% 1/16W 0402" R0402 2890,670 r180 top (schematic designator R87)
R51 "RES SMD 0 OHM JUMPER 1/16W 0402" R0402 3335,1520 r0 bottom (schematic designator R63)
R52 "RES SMD 10K OHM 1% 1/16W 0402" R0402 2840,1655 r90 top (schematic designator R64)
R53 "RES SMD 10K OHM 1% 1/16W 0402" R0402 2890,1655 r270 top (schematic designator R65)
R54 "RES SMD 100K OHM 1% 1/16W 0402" R0402 3335,1720 r180 bottom (schematic designator R66)
R55 "RES SMD 100K OHM 1% 1/16W 0402" R0402 3335,1680 r180 bottom (schematic designator R67)
R56 "RES SMD 100K OHM 1% 1/16W 0402" R0402 2900,1400 r90 bottom (schematic designator R68)
R57 "RES SMD 100K OHM 1% 1/16W 0402" R0402 3090,1400 r90 bottom (schematic designator R69)
R58 "RES SMD 0 OHM JUMPER 1/16W 0402" R0402 1765,635 r90 top (schematic designator R51)
R59 "RES SMD 0 OHM JUMPER 1/16W 0402" R0402 1765,1005 r90 top (schematic designator R52)
R60 "RES SMD 0 OHM JUMPER 1/16W 0402" R0402 1400,1615 r0 bottom (schematic designator R53)
R61 "DNP*" R0402 1550,585 r180 bottom (schematic designator R54)
R62 "DNP*" R0402 1550,975 r180 bottom (schematic designator R55)
R63 "DNP*" R0402 1375,1965 r0 bottom (schematic designator R56)
R64 "RES SMD 68.1K OHM 1% 1/16W 0402" R0402 1380,2070 r270 top (schematic designator R1)
R65 "RES SMD 18.2K OHM 1% 1/16W 0402" R0402 1275,1845 r180 top (schematic designator R2)
R66 "RES SMD 18.2K OHM 1% 1/16W 0402" R0402 1275,1885 r180 top (schematic designator R3)
R67 "RES SMD 360KOHM 1% 1/16W 0402" R0402 1340,2070 r270 top (schematic designator R4)
R68 "RES SMD 10K OHM 1% 1/16W 0402" R0402 1280,2050 r0 top (schematic designator R5)
R69 "RES SMD 1K OHM 1% 1/16W 0402" R0402 1340,1950 r270 top (schematic designator R6)
R70 "RES SMD 47K OHM 1% 1/16W 0402" R0402 1380,1950 r270 top (schematic designator R7)
R71 "RES SMD 10K OHM 1% 1/16W 0402" R0402 1345,1685 r90 top (schematic designator R8)
R72 "RES SMD 10K OHM 1% 1/16W 0402" R0402 1385,1685 r90 top (schematic designator R9)
R73 "RES SMD 10K OHM 1% 1/16W 0402" R0402 1275,1725 r0 top (schematic designator R10)
R74 "RES SMD 10K OHM 1% 1/16W 0402" R0402 1275,1765 r0 top (schematic designator R11)
R75 "RES SMD 2.2 OHM 5% 1W 2512" R2512 1575,2000 r180 top (schematic designator R12)
R76 "RES SMD 2.2 OHM 5% 1W 2512" R2512 1575,1650 r180 top (schematic designator R13)
R77 "RES SMD 100K OHM 1% 1/16W 0402" R0402 480,1375 r90 bottom (schematic designator R1)
R78 "RES SMD 100K OHM 1% 1/16W 0402" R0402 520,1375 r90 bottom (schematic designator R2)
R79 "RES SMD 536K OHM 1% 1/16W 0402" R0402 560,1375 r270 bottom (schematic designator R3)
R80 "RES SMD 100K OHM 1% 1/16W 0402" R0402 75,1440 r0 top (schematic designator R3)
R81 "RES SMD 100K OHM 1% 1/16W 0402" R0402 275,1400 r180 top (schematic designator R4)
R82 "DNP*" R0402 1110,1460 r180 bottom (schematic designator R5)
R83 "RES SMD 10K OHM 1% 1/16W 0402" R0402 1030,1460 r180 bottom (schematic designator R6)
R84 "RES SMD 0 OHM JUMPER 1/16W 0402" R0402 1070,1380 r0 bottom (schematic designator R7)
R85 "DNP*" R0402 1110,1420 r180 bottom (schematic designator R8)
R86 "RES SMD 10K OHM 1% 1/16W 0402" R0402 1030,1420 r180 bottom (schematic designator R9)
R87 "RES SMD 10K OHM 1% 1/16W 0402" R0402 1475,1255 r180 top (schematic designator R10)
R88 "RES SMD 10K OHM 1% 1/16W 0402" R0402 1475,1215 r180 top (schematic designator R11)
R89 "RES SMD 390K OHM 1% 1/16W 0402" R0402 470,700 r0 bottom (schematic designator R35)
R90 "RES SMD 390K OHM 1% 1/16W 0402" R0402 470,660 r0 bottom (schematic designator R36)
R91 "RES SMD 100K OHM 1% 1/16W 0402" R0402 570,855 r90 bottom (schematic designator R37)
R92 "RES SMD 75K OHM 1% 1/16W 0402" R0402 550,700 r180 bottom (schematic designator R38)
R93 "RES SMD 75K OHM 1% 1/16W 0402" R0402 550,660 r180 bottom (schematic designator R39)
R94 "RES SMD 100K OHM 1% 1/16W 0402" R0402 470,780 r180 bottom (schematic designator R40)
R95 "RES SMD 27K OHM 1% 1/16W 0402" R0402 470,740 r0 bottom (schematic designator R41)
R96 "RES SMD 75K OHM 1% 1/16W 0402" R0402 550,740 r180 bottom (schematic designator R42)
R97 "RES SMD 10K OHM 1% 1/16W 0402" R0402 2335,1440 r180 bottom (schematic designator R1)
R98 "RES SMD 402 OHM 1% 1/16W 0402" R0402 2280,1610 r90 bottom (schematic designator R2)
R99 "RES SMD 10K OHM 1% 1/16W 0402" R0402 2360,1610 r270 bottom (schematic designator R3)
R100 "RES SMD 54.9K OHM 1% 1/16W 0402" R0402 1365,715 r180 bottom (schematic designator R1)
R101 "RES SMD 1.2K OHM 1% 1/16W 0402" R0402 1450,875 r180 bottom (schematic designator R2)
R102 "DNP*" R0402 1365,675 r0 bottom (schematic designator R3)
R103 "RES SMD 10K OHM 1% 1/16W 0402" R0402 1450,795 r0 bottom (schematic designator R4)
R104 "RES SMD 2.7K OHM 1% 1/16W 0402" R0402 1450,675 r0 bottom (schematic designator R5)
R105 "RES SMD 44.2K OHM 1% 1/16W 0402" R0402 1450,755 r180 bottom (schematic designator R6)
R106 "RES SMD 11K OHM 1% 1/16W 0402" R0402 1450,715 r180 bottom (schematic designator R7)
R107 "DNP*" R0402 1190,470 r270 bottom (schematic designator R2)
R108 "DNP*" R0402 1230,470 r270 bottom (schematic designator R3)
R109 "RES SMD 4.75K OHM 1% 1/16W 0402" R0402 1270,470 r270 bottom (schematic designator R4)
R110 "RES SMD 39 OHM 1% 1/4W 1206" R1206 1130,75 r180 bottom (schematic designator R5)
R111 "RES SMD 0 OHM JUMPER 1/16W 0402" R0402 575,1550 r270 top (schematic designator R1)
R112 "RES SMD 0 OHM JUMPER 1/16W 0402" R0402 1480,275 r270 top (schematic designator R2)
R113 "RES SMD 100 OHM 1% 1/16W 0402" 0402R 1045,1905 r180 top (schematic designator R57)
R114 "RES SMD 63.4K OHM 1% 1/16W 0402" R_0402 965,1735 r270 top (schematic designator R58)
R115 "RES SMD 100K OHM 1% 1/16W 0402" 0402R 1045,1855 r0 top (schematic designator R59)
R116 "RES SMD 100K OHM 1% 1/16W 0402" 0402R 850,2025 r90 top (schematic designator R60)
R117 "RES SMD 100 OHM 1% 1/16W 0402" R0402 3335,1560 r0 bottom (schematic designator R1)
R118 "RES SMD 10K OHM 1% 1/16W 0402" R0402 3335,1600 r180 bottom (schematic designator R2)
R119 "RES SMD 10K OHM 1% 1/16W 0402" R0402 850,225 r0 top (schematic designator R1)
R120 "RES SMD 10K OHM 1% 1/16W 0402" R0402 850,125 r0 top (schematic designator R2)
R121 "RES SMD 10K OHM 1% 1/16W 0402" R0402 1300,175 r180 top (schematic designator R3)
R122 "RES SMD 100 OHM 1% 1/16W 0402" R0402 200,760 r0 top (schematic designator R1)
R123 "RES SMD 10K OHM 1% 1/16W 0402" R0402 1750,85 r270 top (schematic designator R1)
R124 "RES SMD 100 OHM 1% 1/2W 0805" R0805 1540,140 r90 top (schematic designator R2)
R125 "RES SMD 910K OHM 1% 1/16W 0402" R_0402 590,1940 r90 top (schematic designator R1)
R126 "RES SMD 390K OHM 1% 1/16W 0402" R0402 670,1940 r90 top (schematic designator R2)
R127 "RES SMD 88.7K OHM 1% 1/16W 0402" 0402R 630,1940 r90 top (schematic designator R3)
R128 "RES SMD 23.7K OHM 1% 1/16W 0402" R0402 2450,1570 r180 bottom (schematic designator R1)
R129 "RES SMD 47K OHM 1% 1/16W 0402" R0402 2450,1610 r180 bottom (schematic designator R2)